# EAGLE board 14148-Qwiic_UV_Sensor_VEML6075-Panel (EAGLE 9.1.0), part 1 of 2
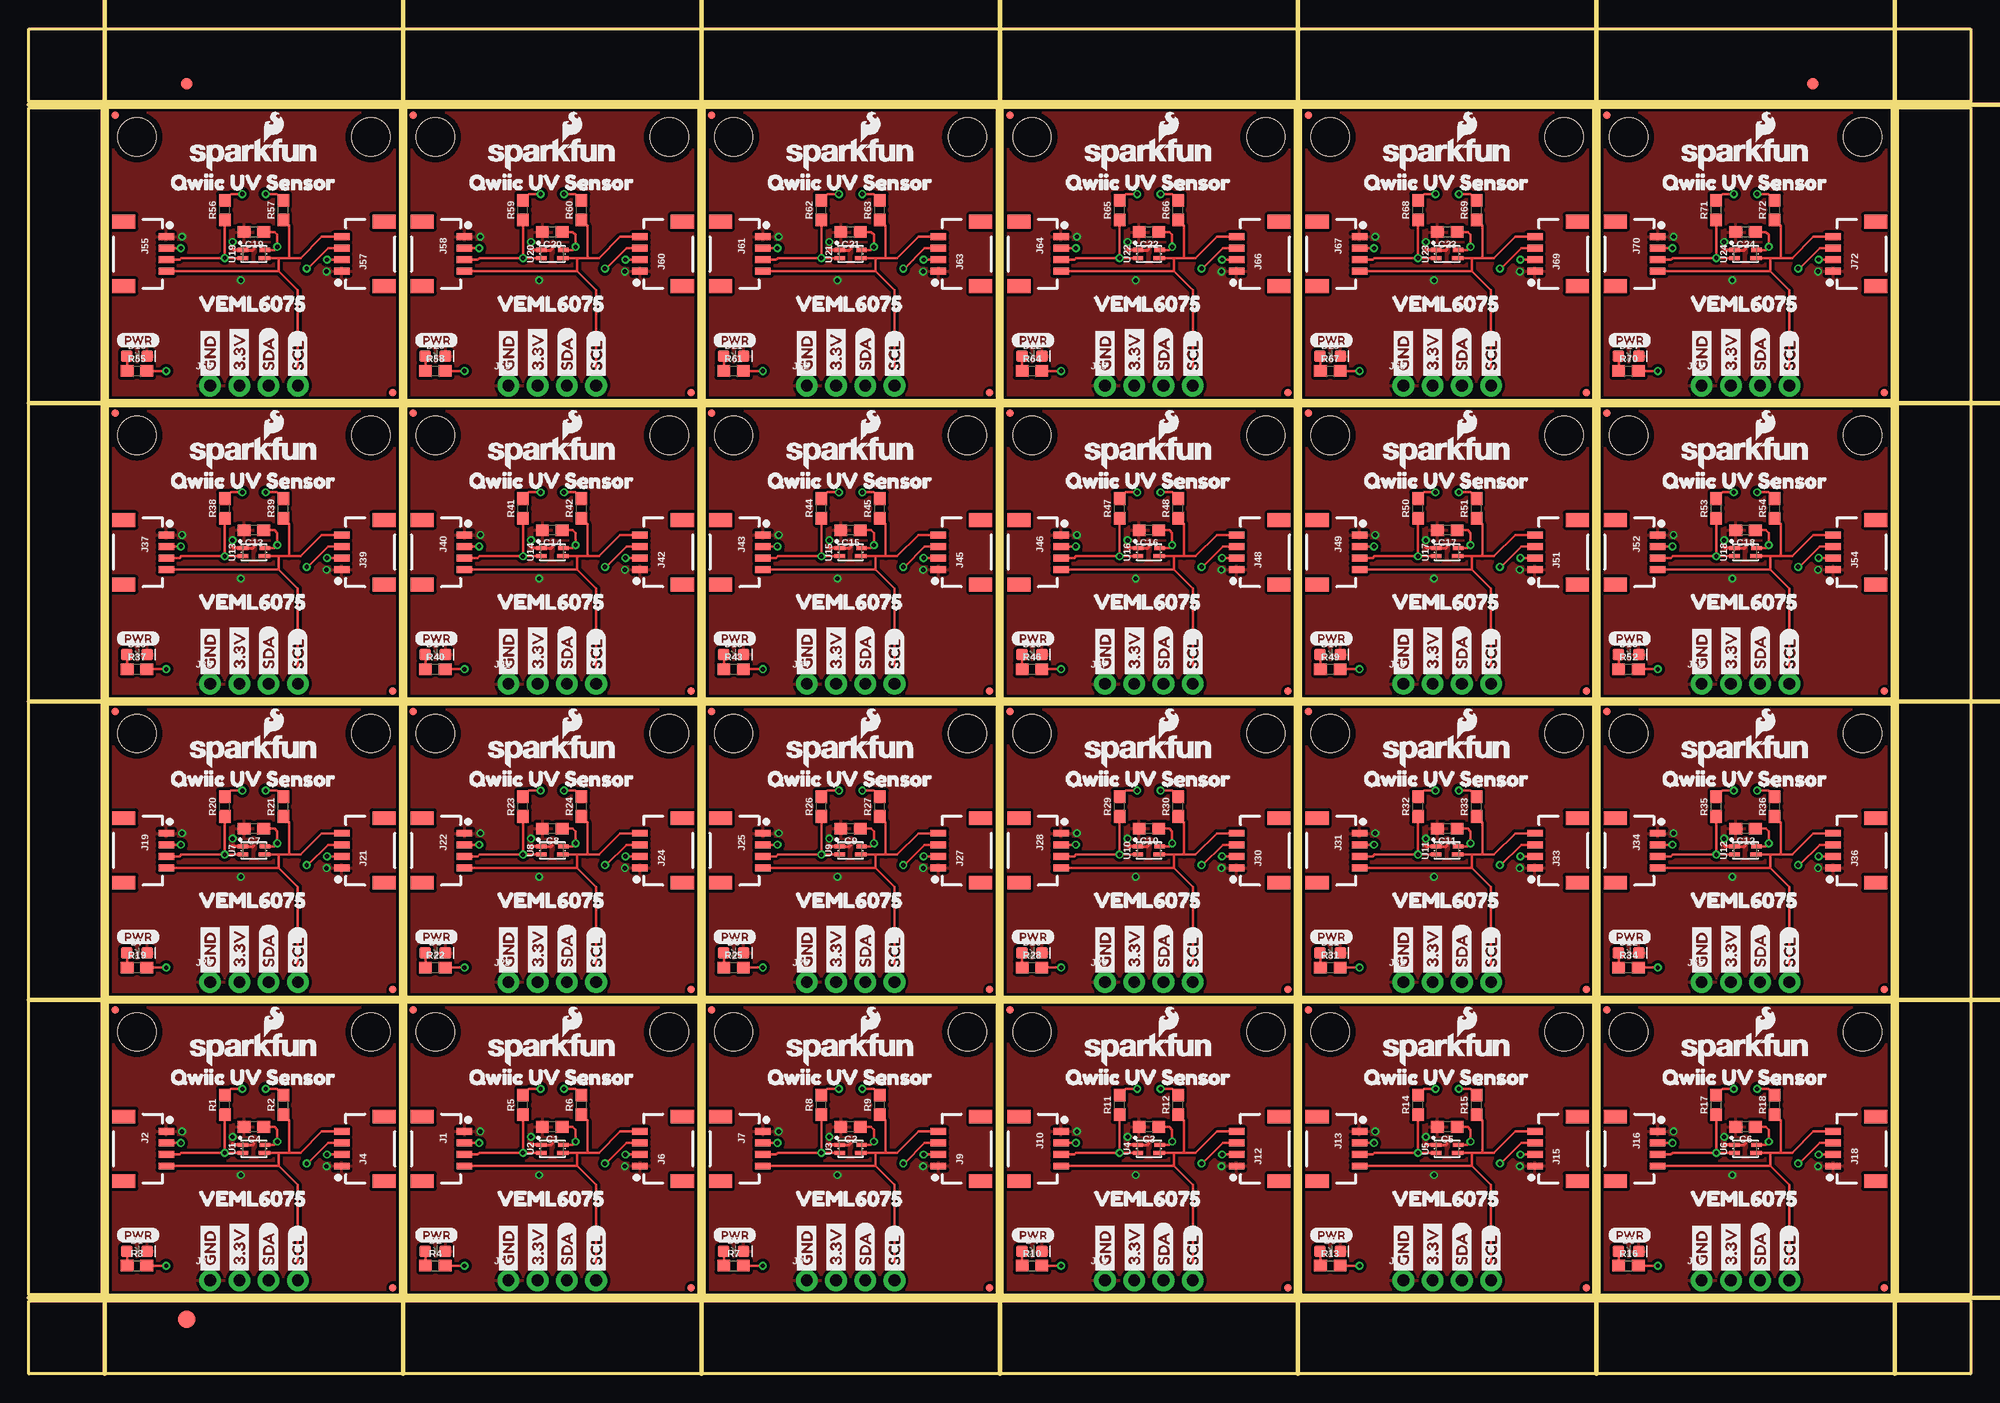
[diagram p0: board, top side]
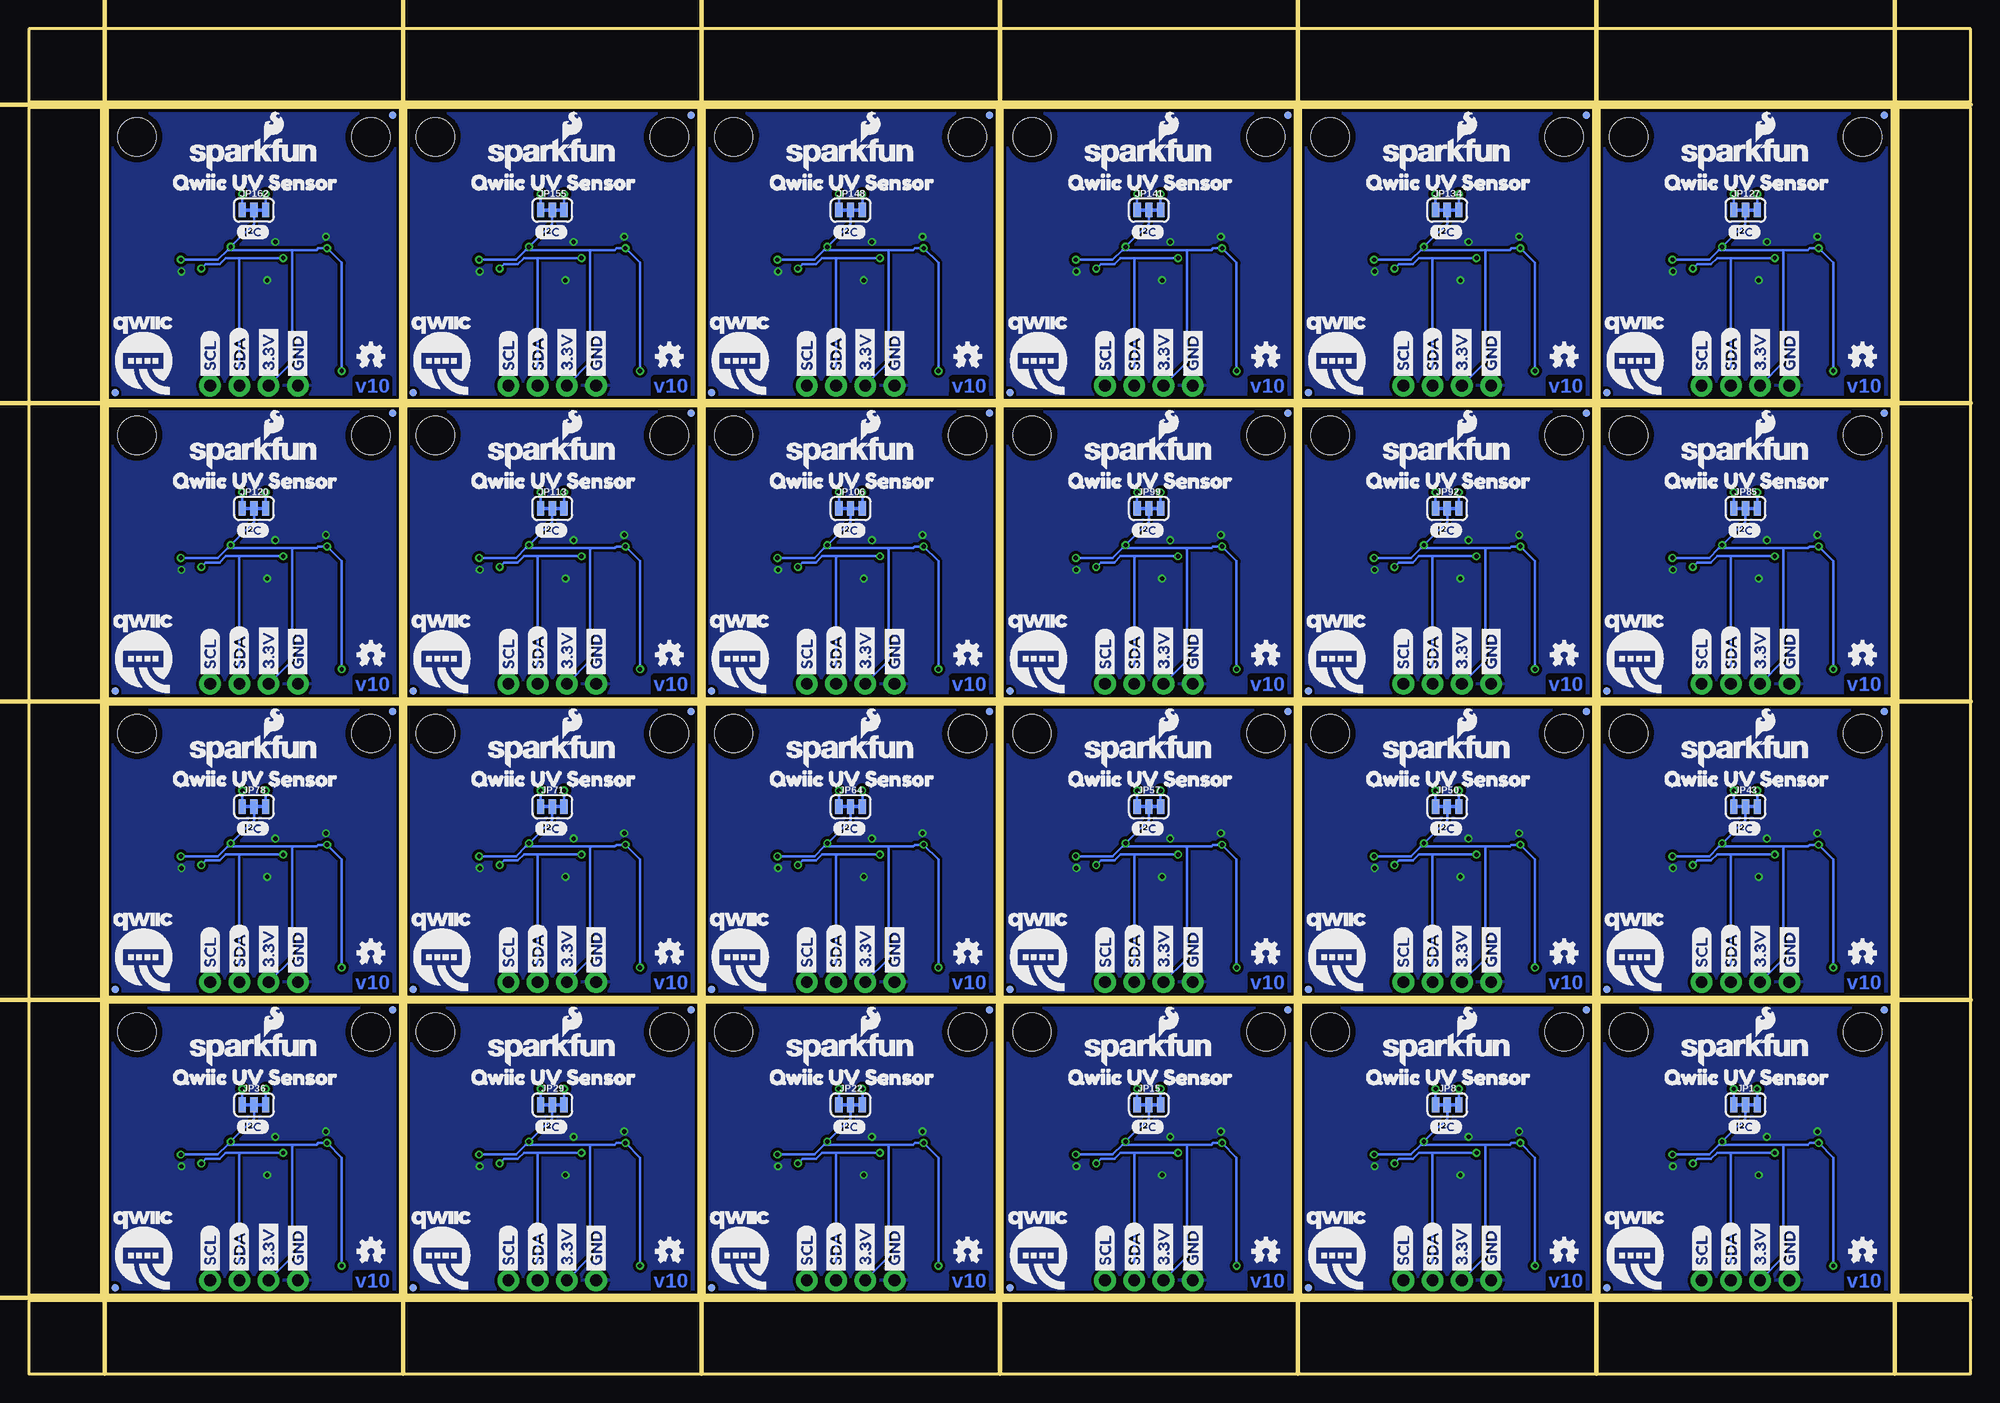
[diagram p1: board, bottom side, seen from below]

Size 168.66 x 116.84 mm. Coordinates in mm from the lower left corner, seen from the top.
Outline: 6.86,6.86 32.26,6.86 32.26,32.26 6.86,32.26 6.86,6.86
Outline: 32.77,6.86 58.17,6.86 58.17,32.26 32.77,32.26 32.77,6.86
Outline: 58.67,6.86 84.07,6.86 84.07,32.26 58.67,32.26 58.67,6.86
Outline: 84.58,6.86 109.98,6.86 109.98,32.26 84.58,32.26 84.58,6.86
Outline: 110.49,6.86 135.89,6.86 135.89,32.26 110.49,32.26 110.49,6.86
Outline: 136.4,6.86 161.8,6.86 161.8,32.26 136.4,32.26 136.4,6.86
Outline: 6.86,32.77 32.26,32.77 32.26,58.17 6.86,58.17 6.86,32.77
Outline: 32.77,32.77 58.17,32.77 58.17,58.17 32.77,58.17 32.77,32.77
Outline: 58.67,32.77 84.07,32.77 84.07,58.17 58.67,58.17 58.67,32.77
Outline: 84.58,32.77 109.98,32.77 109.98,58.17 84.58,58.17 84.58,32.77
Outline: 110.49,32.77 135.89,32.77 135.89,58.17 110.49,58.17 110.49,32.77
Outline: 136.4,32.77 161.8,32.77 161.8,58.17 136.4,58.17 136.4,32.77
Outline: 6.86,58.67 32.26,58.67 32.26,84.07 6.86,84.07 6.86,58.67
Outline: 32.77,58.67 58.17,58.67 58.17,84.07 32.77,84.07 32.77,58.67
Outline: 58.67,58.67 84.07,58.67 84.07,84.07 58.67,84.07 58.67,58.67
Outline: 84.58,58.67 109.98,58.67 109.98,84.07 84.58,84.07 84.58,58.67
Outline: 110.49,58.67 135.89,58.67 135.89,84.07 110.49,84.07 110.49,58.67
Outline: 136.4,58.67 161.8,58.67 161.8,84.07 136.4,84.07 136.4,58.67
Outline: 6.86,84.58 32.26,84.58 32.26,109.98 6.86,109.98 6.86,84.58
Outline: 32.77,84.58 58.17,84.58 58.17,109.98 32.77,109.98 32.77,84.58
Outline: 58.67,84.58 84.07,84.58 84.07,109.98 58.67,109.98 58.67,84.58
Outline: 84.58,84.58 109.98,84.58 109.98,109.98 84.58,109.98 84.58,84.58
Outline: 110.49,84.58 135.89,84.58 135.89,109.98 110.49,109.98 110.49,84.58
Outline: 136.4,84.58 161.8,84.58 161.8,109.98 136.4,109.98 136.4,84.58
Outline: 0,6.35 168.66,6.35 168.66,0 0,0 0,6.35
Outline: 162.31,109.98 168.66,109.98 168.66,6.86 162.31,6.86 162.31,109.98
Outline: 0,116.84 168.66,116.84 168.66,110.49 0,110.49 0,116.84
Outline: 0,109.98 6.35,109.98 6.35,6.86 0,6.86 0,109.98
Copper layers (1*16): Top 0.035mm / dielectric 1.5mm / Bottom 0.035mm
Design rules "SparkFun-2-layer-PCBWay-LIMIT": minimum track width 6mil, minimum drill 0.3mm, track to track 6mil, track to pad 6mil, pad to pad 6mil, via to via 6mil, smd to smd 6mil, copper to edge 6mil, drill to drill 6mil, minimum pad ring 6mil, minimum via ring 6mil, stop-mask expansion 4mil, vias tented up to drill 25mil, thermal gap 10mil
Milling: 12 lines

## Footprints (pad centres in the part's own frame; a part is rotated, then mirrored left to right if it is on the bottom)
0603 = smd 1.1 x 1: 1 -0.85,0; 2 0.85,0
LED-0603 = smd 1 x 1: A -0.877,0; C 0.877,0
FIDUCIAL-1X2 = smd 1 x 1: 1 0,0
FIDUCIAL-1.5X3 = smd 1.5 x 1.5: 1 0,0
1X04_1MM_RA = smd 0.6 x 1.35: 1 -1.5,0; 2 -0.5,0; 3 0.5,0; 4 1.5,0 | smd 1.2 x 2: NC1 2.8,-3.675; NC2 -2.8,-3.675
1X04_NO_SILK = drill 1.016 pad 1.88: 1 0,0; 2 2.54,0; 3 5.08,0; 4 7.62,0
SMT-JUMPER_3_2-NC_TRACE_SILK = smd 0.635 x 1.27: 1 -1.016,0; 2 0,0; 3 1.016,0
MICRO-FIDUCIAL = smd 0.635 x 0.635: 1 0,0
STAND-OFF = hole 3.302: 0,0
VEML6075_A3OP = smd 0.9 x 0.35: 1 -0.95,0.35; 2 -0.95,-0.35; 4 0.95,0.35 | smd 1 x 0.35: 3 0.9,-0.35

## Placement (x,y rotation side)
C1  0.1uF  [0603]  45.47,21.46 180 top
C2  0.1uF  [0603]  71.37,21.46 180 top
C3  0.1uF  [0603]  97.28,21.46 180 top
C4  0.1uF  [0603]  19.56,21.46 180 top
C5  0.1uF  [0603]  123.19,21.46 180 top
C6  0.1uF  [0603]  149.1,21.46 180 top
C7  0.1uF  [0603]  19.56,47.37 180 top
C8  0.1uF  [0603]  45.47,47.37 180 top
C9  0.1uF  [0603]  71.37,47.37 180 top
C10  0.1uF  [0603]  97.28,47.37 180 top
C11  0.1uF  [0603]  123.19,47.37 180 top
C12  0.1uF  [0603]  149.1,47.37 180 top
C13  0.1uF  [0603]  19.56,73.28 180 top
C14  0.1uF  [0603]  45.47,73.28 180 top
C15  0.1uF  [0603]  71.37,73.28 180 top
C16  0.1uF  [0603]  97.28,73.28 180 top
C17  0.1uF  [0603]  123.19,73.28 180 top
C18  0.1uF  [0603]  149.1,73.28 180 top
C19  0.1uF  [0603]  19.56,99.19 180 top
C20  0.1uF  [0603]  45.47,99.19 180 top
C21  0.1uF  [0603]  71.37,99.19 180 top
C22  0.1uF  [0603]  97.28,99.19 180 top
C23  0.1uF  [0603]  123.19,99.19 180 top
C24  0.1uF  [0603]  149.1,99.19 180 top
D1  RED  [LED-0603]  9.4,10.67 0 top
D2  RED  [LED-0603]  35.31,10.67 0 top
D3  RED  [LED-0603]  61.21,10.67 0 top
D4  RED  [LED-0603]  87.12,10.67 0 top
D5  RED  [LED-0603]  113.03,10.67 0 top
D6  RED  [LED-0603]  138.94,10.67 0 top
D7  RED  [LED-0603]  9.4,36.58 0 top
D8  RED  [LED-0603]  35.31,36.58 0 top
D9  RED  [LED-0603]  61.21,36.58 0 top
D10  RED  [LED-0603]  87.12,36.58 0 top
D11  RED  [LED-0603]  113.03,36.58 0 top
D12  RED  [LED-0603]  138.94,36.58 0 top
D13  RED  [LED-0603]  9.4,62.48 0 top
D14  RED  [LED-0603]  35.31,62.48 0 top
D15  RED  [LED-0603]  61.21,62.48 0 top
D16  RED  [LED-0603]  87.12,62.48 0 top
D17  RED  [LED-0603]  113.03,62.48 0 top
D18  RED  [LED-0603]  138.94,62.48 0 top
D19  RED  [LED-0603]  9.4,88.39 0 top
D20  RED  [LED-0603]  35.31,88.39 0 top
D21  RED  [LED-0603]  61.21,88.39 0 top
D22  RED  [LED-0603]  87.12,88.39 0 top
D23  RED  [LED-0603]  113.03,88.39 0 top
D24  RED  [LED-0603]  138.94,88.39 0 top
E$1  [FIDUCIAL-1X2]  13.72,112.08 0 top
E$2  [FIDUCIAL-1X2]  154.94,112.08 0 top
E$3  [FIDUCIAL-1.5X3]  13.72,4.76 0 top
J1  [1X04_1MM_RA]  37.85,19.56 270 top
J2  [1X04_1MM_RA]  11.94,19.56 270 top
J3  PTH  [1X04_NO_SILK]  15.75,8.13 0 top
J4  [1X04_1MM_RA]  27.18,19.56 90 top
J5  PTH  [1X04_NO_SILK]  41.66,8.13 0 top
J6  [1X04_1MM_RA]  53.09,19.56 90 top
J7  [1X04_1MM_RA]  63.75,19.56 270 top
J8  PTH  [1X04_NO_SILK]  67.56,8.13 0 top
J9  [1X04_1MM_RA]  78.99,19.56 90 top
J10  [1X04_1MM_RA]  89.66,19.56 270 top
J11  PTH  [1X04_NO_SILK]  93.47,8.13 0 top
J12  [1X04_1MM_RA]  104.9,19.56 90 top
J13  [1X04_1MM_RA]  115.57,19.56 270 top
J14  PTH  [1X04_NO_SILK]  119.38,8.13 0 top
J15  [1X04_1MM_RA]  130.81,19.56 90 top
J16  [1X04_1MM_RA]  141.48,19.56 270 top
J17  PTH  [1X04_NO_SILK]  145.29,8.13 0 top
J18  [1X04_1MM_RA]  156.72,19.56 90 top
J19  [1X04_1MM_RA]  11.94,45.47 270 top
J20  PTH  [1X04_NO_SILK]  15.75,34.04 0 top
J21  [1X04_1MM_RA]  27.18,45.47 90 top
J22  [1X04_1MM_RA]  37.85,45.47 270 top
J23  PTH  [1X04_NO_SILK]  41.66,34.04 0 top
J24  [1X04_1MM_RA]  53.09,45.47 90 top
J25  [1X04_1MM_RA]  63.75,45.47 270 top
J26  PTH  [1X04_NO_SILK]  67.56,34.04 0 top
J27  [1X04_1MM_RA]  78.99,45.47 90 top
J28  [1X04_1MM_RA]  89.66,45.47 270 top
J29  PTH  [1X04_NO_SILK]  93.47,34.04 0 top
J30  [1X04_1MM_RA]  104.9,45.47 90 top
J31  [1X04_1MM_RA]  115.57,45.47 270 top
J32  PTH  [1X04_NO_SILK]  119.38,34.04 0 top
J33  [1X04_1MM_RA]  130.81,45.47 90 top
J34  [1X04_1MM_RA]  141.48,45.47 270 top
J35  PTH  [1X04_NO_SILK]  145.29,34.04 0 top
J36  [1X04_1MM_RA]  156.72,45.47 90 top
J37  [1X04_1MM_RA]  11.94,71.37 270 top
J38  PTH  [1X04_NO_SILK]  15.75,59.94 0 top
J39  [1X04_1MM_RA]  27.18,71.37 90 top
J40  [1X04_1MM_RA]  37.85,71.37 270 top
J41  PTH  [1X04_NO_SILK]  41.66,59.94 0 top
J42  [1X04_1MM_RA]  53.09,71.37 90 top
J43  [1X04_1MM_RA]  63.75,71.37 270 top
J44  PTH  [1X04_NO_SILK]  67.56,59.94 0 top
J45  [1X04_1MM_RA]  78.99,71.37 90 top
J46  [1X04_1MM_RA]  89.66,71.37 270 top
J47  PTH  [1X04_NO_SILK]  93.47,59.94 0 top
J48  [1X04_1MM_RA]  104.9,71.37 90 top
J49  [1X04_1MM_RA]  115.57,71.37 270 top
J50  PTH  [1X04_NO_SILK]  119.38,59.94 0 top
J51  [1X04_1MM_RA]  130.81,71.37 90 top
J52  [1X04_1MM_RA]  141.48,71.37 270 top
J53  PTH  [1X04_NO_SILK]  145.29,59.94 0 top
J54  [1X04_1MM_RA]  156.72,71.37 90 top
J55  [1X04_1MM_RA]  11.94,97.28 270 top
J56  PTH  [1X04_NO_SILK]  15.75,85.85 0 top
J57  [1X04_1MM_RA]  27.18,97.28 90 top
J58  [1X04_1MM_RA]  37.85,97.28 270 top
J59  PTH  [1X04_NO_SILK]  41.66,85.85 0 top
J60  [1X04_1MM_RA]  53.09,97.28 90 top
J61  [1X04_1MM_RA]  63.75,97.28 270 top
J62  PTH  [1X04_NO_SILK]  67.56,85.85 0 top
J63  [1X04_1MM_RA]  78.99,97.28 90 top
J64  [1X04_1MM_RA]  89.66,97.28 270 top
J65  PTH  [1X04_NO_SILK]  93.47,85.85 0 top
J66  [1X04_1MM_RA]  104.9,97.28 90 top
J67  [1X04_1MM_RA]  115.57,97.28 270 top
J68  PTH  [1X04_NO_SILK]  119.38,85.85 0 top
J69  [1X04_1MM_RA]  130.81,97.28 90 top
J70  [1X04_1MM_RA]  141.48,97.28 270 top
J71  PTH  [1X04_NO_SILK]  145.29,85.85 0 top
J72  [1X04_1MM_RA]  156.72,97.28 90 top
JP1  I2C  [SMT-JUMPER_3_2-NC_TRACE_SILK]  19.56,23.37 0 bottom
JP2  FIDUCIALUFIDUCIAL  [MICRO-FIDUCIAL]  31.62,7.49 0 bottom
JP3  STAND-OFF  [STAND-OFF]  9.4,29.72 0 top
JP4  STAND-OFF  [STAND-OFF]  29.72,29.72 90 top
JP5  FIDUCIALUFIDUCIAL  [MICRO-FIDUCIAL]  31.62,7.49 0 top
JP6  FIDUCIALUFIDUCIAL  [MICRO-FIDUCIAL]  7.49,31.62 0 top
JP7  FIDUCIALUFIDUCIAL  [MICRO-FIDUCIAL]  7.49,31.62 0 bottom
JP8  I2C  [SMT-JUMPER_3_2-NC_TRACE_SILK]  45.47,23.37 0 bottom
JP9  STAND-OFF  [STAND-OFF]  35.31,29.72 0 top
JP10  STAND-OFF  [STAND-OFF]  55.63,29.72 90 top
JP11  FIDUCIALUFIDUCIAL  [MICRO-FIDUCIAL]  57.53,7.49 0 bottom
JP12  FIDUCIALUFIDUCIAL  [MICRO-FIDUCIAL]  33.4,31.62 0 top
JP13  FIDUCIALUFIDUCIAL  [MICRO-FIDUCIAL]  57.53,7.49 0 top
JP14  FIDUCIALUFIDUCIAL  [MICRO-FIDUCIAL]  33.4,31.62 0 bottom
JP15  I2C  [SMT-JUMPER_3_2-NC_TRACE_SILK]  71.37,23.37 0 bottom
JP16  STAND-OFF  [STAND-OFF]  61.21,29.72 0 top
JP17  STAND-OFF  [STAND-OFF]  81.53,29.72 90 top
JP18  FIDUCIALUFIDUCIAL  [MICRO-FIDUCIAL]  83.44,7.49 0 bottom
JP19  FIDUCIALUFIDUCIAL  [MICRO-FIDUCIAL]  59.31,31.62 0 top
JP20  FIDUCIALUFIDUCIAL  [MICRO-FIDUCIAL]  83.44,7.49 0 top
JP21  FIDUCIALUFIDUCIAL  [MICRO-FIDUCIAL]  59.31,31.62 0 bottom
JP22  I2C  [SMT-JUMPER_3_2-NC_TRACE_SILK]  97.28,23.37 0 bottom
JP23  STAND-OFF  [STAND-OFF]  87.12,29.72 0 top
JP24  STAND-OFF  [STAND-OFF]  107.44,29.72 90 top
JP25  FIDUCIALUFIDUCIAL  [MICRO-FIDUCIAL]  109.35,7.49 0 bottom
JP26  FIDUCIALUFIDUCIAL  [MICRO-FIDUCIAL]  85.22,31.62 0 top
JP27  FIDUCIALUFIDUCIAL  [MICRO-FIDUCIAL]  109.35,7.49 0 top
JP28  FIDUCIALUFIDUCIAL  [MICRO-FIDUCIAL]  85.22,31.62 0 bottom
JP29  I2C  [SMT-JUMPER_3_2-NC_TRACE_SILK]  123.19,23.37 0 bottom
JP30  STAND-OFF  [STAND-OFF]  113.03,29.72 0 top
JP31  STAND-OFF  [STAND-OFF]  133.35,29.72 90 top
JP32  FIDUCIALUFIDUCIAL  [MICRO-FIDUCIAL]  135.25,7.49 0 bottom
JP33  FIDUCIALUFIDUCIAL  [MICRO-FIDUCIAL]  111.12,31.62 0 top
JP34  FIDUCIALUFIDUCIAL  [MICRO-FIDUCIAL]  135.25,7.49 0 top
JP35  FIDUCIALUFIDUCIAL  [MICRO-FIDUCIAL]  111.12,31.62 0 bottom
JP36  I2C  [SMT-JUMPER_3_2-NC_TRACE_SILK]  149.1,23.37 0 bottom
JP37  STAND-OFF  [STAND-OFF]  138.94,29.72 0 top
JP38  STAND-OFF  [STAND-OFF]  159.26,29.72 90 top
JP39  FIDUCIALUFIDUCIAL  [MICRO-FIDUCIAL]  161.16,7.49 0 bottom
JP40  FIDUCIALUFIDUCIAL  [MICRO-FIDUCIAL]  137.03,31.62 0 top
JP41  FIDUCIALUFIDUCIAL  [MICRO-FIDUCIAL]  161.16,7.49 0 top
JP42  FIDUCIALUFIDUCIAL  [MICRO-FIDUCIAL]  137.03,31.62 0 bottom
JP43  I2C  [SMT-JUMPER_3_2-NC_TRACE_SILK]  19.56,49.28 0 bottom
JP44  STAND-OFF  [STAND-OFF]  9.4,55.63 0 top
JP45  STAND-OFF  [STAND-OFF]  29.72,55.63 90 top
JP46  FIDUCIALUFIDUCIAL  [MICRO-FIDUCIAL]  31.62,33.4 0 bottom
JP47  FIDUCIALUFIDUCIAL  [MICRO-FIDUCIAL]  7.49,57.53 0 top
JP48  FIDUCIALUFIDUCIAL  [MICRO-FIDUCIAL]  31.62,33.4 0 top
JP49  FIDUCIALUFIDUCIAL  [MICRO-FIDUCIAL]  7.49,57.53 0 bottom
JP50  I2C  [SMT-JUMPER_3_2-NC_TRACE_SILK]  45.47,49.28 0 bottom
JP51  STAND-OFF  [STAND-OFF]  35.31,55.63 0 top
JP52  STAND-OFF  [STAND-OFF]  55.63,55.63 90 top
JP53  FIDUCIALUFIDUCIAL  [MICRO-FIDUCIAL]  57.53,33.4 0 bottom
JP54  FIDUCIALUFIDUCIAL  [MICRO-FIDUCIAL]  33.4,57.53 0 top
JP55  FIDUCIALUFIDUCIAL  [MICRO-FIDUCIAL]  57.53,33.4 0 top
JP56  FIDUCIALUFIDUCIAL  [MICRO-FIDUCIAL]  33.4,57.53 0 bottom
JP57  I2C  [SMT-JUMPER_3_2-NC_TRACE_SILK]  71.37,49.28 0 bottom
JP58  STAND-OFF  [STAND-OFF]  61.21,55.63 0 top
JP59  STAND-OFF  [STAND-OFF]  81.53,55.63 90 top
JP60  FIDUCIALUFIDUCIAL  [MICRO-FIDUCIAL]  83.44,33.4 0 bottom
JP61  FIDUCIALUFIDUCIAL  [MICRO-FIDUCIAL]  59.31,57.53 0 top
JP62  FIDUCIALUFIDUCIAL  [MICRO-FIDUCIAL]  83.44,33.4 0 top
JP63  FIDUCIALUFIDUCIAL  [MICRO-FIDUCIAL]  59.31,57.53 0 bottom
JP64  I2C  [SMT-JUMPER_3_2-NC_TRACE_SILK]  97.28,49.28 0 bottom
JP65  STAND-OFF  [STAND-OFF]  87.12,55.63 0 top
JP66  STAND-OFF  [STAND-OFF]  107.44,55.63 90 top
JP67  FIDUCIALUFIDUCIAL  [MICRO-FIDUCIAL]  109.35,33.4 0 bottom
JP68  FIDUCIALUFIDUCIAL  [MICRO-FIDUCIAL]  85.22,57.53 0 top
JP69  FIDUCIALUFIDUCIAL  [MICRO-FIDUCIAL]  109.35,33.4 0 top
JP70  FIDUCIALUFIDUCIAL  [MICRO-FIDUCIAL]  85.22,57.53 0 bottom
JP71  I2C  [SMT-JUMPER_3_2-NC_TRACE_SILK]  123.19,49.28 0 bottom
JP72  STAND-OFF  [STAND-OFF]  113.03,55.63 0 top
JP73  STAND-OFF  [STAND-OFF]  133.35,55.63 90 top
JP74  FIDUCIALUFIDUCIAL  [MICRO-FIDUCIAL]  135.25,33.4 0 bottom
JP75  FIDUCIALUFIDUCIAL  [MICRO-FIDUCIAL]  111.12,57.53 0 top
JP76  FIDUCIALUFIDUCIAL  [MICRO-FIDUCIAL]  135.25,33.4 0 top
JP77  FIDUCIALUFIDUCIAL  [MICRO-FIDUCIAL]  111.12,57.53 0 bottom
JP78  I2C  [SMT-JUMPER_3_2-NC_TRACE_SILK]  149.1,49.28 0 bottom
JP79  STAND-OFF  [STAND-OFF]  138.94,55.63 0 top
JP80  STAND-OFF  [STAND-OFF]  159.26,55.63 90 top
JP81  FIDUCIALUFIDUCIAL  [MICRO-FIDUCIAL]  161.16,33.4 0 bottom
JP82  FIDUCIALUFIDUCIAL  [MICRO-FIDUCIAL]  137.03,57.53 0 top
JP83  FIDUCIALUFIDUCIAL  [MICRO-FIDUCIAL]  161.16,33.4 0 top
JP84  FIDUCIALUFIDUCIAL  [MICRO-FIDUCIAL]  137.03,57.53 0 bottom
JP85  I2C  [SMT-JUMPER_3_2-NC_TRACE_SILK]  19.56,75.18 0 bottom
JP86  STAND-OFF  [STAND-OFF]  9.4,81.53 0 top
JP87  STAND-OFF  [STAND-OFF]  29.72,81.53 90 top
JP88  FIDUCIALUFIDUCIAL  [MICRO-FIDUCIAL]  31.62,59.31 0 bottom
JP89  FIDUCIALUFIDUCIAL  [MICRO-FIDUCIAL]  7.49,83.44 0 top
JP90  FIDUCIALUFIDUCIAL  [MICRO-FIDUCIAL]  31.62,59.31 0 top
JP91  FIDUCIALUFIDUCIAL  [MICRO-FIDUCIAL]  7.49,83.44 0 bottom
JP92  I2C  [SMT-JUMPER_3_2-NC_TRACE_SILK]  45.47,75.18 0 bottom
JP93  STAND-OFF  [STAND-OFF]  35.31,81.53 0 top
JP94  STAND-OFF  [STAND-OFF]  55.63,81.53 90 top
JP95  FIDUCIALUFIDUCIAL  [MICRO-FIDUCIAL]  57.53,59.31 0 bottom
JP96  FIDUCIALUFIDUCIAL  [MICRO-FIDUCIAL]  33.4,83.44 0 top
JP97  FIDUCIALUFIDUCIAL  [MICRO-FIDUCIAL]  57.53,59.31 0 top
JP98  FIDUCIALUFIDUCIAL  [MICRO-FIDUCIAL]  33.4,83.44 0 bottom
JP99  I2C  [SMT-JUMPER_3_2-NC_TRACE_SILK]  71.37,75.18 0 bottom
JP100  STAND-OFF  [STAND-OFF]  61.21,81.53 0 top
JP101  STAND-OFF  [STAND-OFF]  81.53,81.53 90 top
JP102  FIDUCIALUFIDUCIAL  [MICRO-FIDUCIAL]  83.44,59.31 0 bottom
JP103  FIDUCIALUFIDUCIAL  [MICRO-FIDUCIAL]  59.31,83.44 0 top
JP104  FIDUCIALUFIDUCIAL  [MICRO-FIDUCIAL]  83.44,59.31 0 top
JP105  FIDUCIALUFIDUCIAL  [MICRO-FIDUCIAL]  59.31,83.44 0 bottom
JP106  I2C  [SMT-JUMPER_3_2-NC_TRACE_SILK]  97.28,75.18 0 bottom
JP107  STAND-OFF  [STAND-OFF]  87.12,81.53 0 top
JP108  STAND-OFF  [STAND-OFF]  107.44,81.53 90 top
JP109  FIDUCIALUFIDUCIAL  [MICRO-FIDUCIAL]  109.35,59.31 0 bottom
JP110  FIDUCIALUFIDUCIAL  [MICRO-FIDUCIAL]  85.22,83.44 0 top
JP111  FIDUCIALUFIDUCIAL  [MICRO-FIDUCIAL]  109.35,59.31 0 top
JP112  FIDUCIALUFIDUCIAL  [MICRO-FIDUCIAL]  85.22,83.44 0 bottom
JP113  I2C  [SMT-JUMPER_3_2-NC_TRACE_SILK]  123.19,75.18 0 bottom
JP114  STAND-OFF  [STAND-OFF]  113.03,81.53 0 top
JP115  STAND-OFF  [STAND-OFF]  133.35,81.53 90 top
JP116  FIDUCIALUFIDUCIAL  [MICRO-FIDUCIAL]  135.25,59.31 0 bottom
JP117  FIDUCIALUFIDUCIAL  [MICRO-FIDUCIAL]  111.12,83.44 0 top
JP118  FIDUCIALUFIDUCIAL  [MICRO-FIDUCIAL]  135.25,59.31 0 top
JP119  FIDUCIALUFIDUCIAL  [MICRO-FIDUCIAL]  111.12,83.44 0 bottom
JP120  I2C  [SMT-JUMPER_3_2-NC_TRACE_SILK]  149.1,75.18 0 bottom
JP121  STAND-OFF  [STAND-OFF]  138.94,81.53 0 top
JP122  STAND-OFF  [STAND-OFF]  159.26,81.53 90 top
JP123  FIDUCIALUFIDUCIAL  [MICRO-FIDUCIAL]  161.16,59.31 0 bottom
JP124  FIDUCIALUFIDUCIAL  [MICRO-FIDUCIAL]  137.03,83.44 0 top
JP125  FIDUCIALUFIDUCIAL  [MICRO-FIDUCIAL]  161.16,59.31 0 top
JP126  FIDUCIALUFIDUCIAL  [MICRO-FIDUCIAL]  137.03,83.44 0 bottom
JP127  I2C  [SMT-JUMPER_3_2-NC_TRACE_SILK]  19.56,101.09 0 bottom
JP128  STAND-OFF  [STAND-OFF]  9.4,107.44 0 top
JP129  STAND-OFF  [STAND-OFF]  29.72,107.44 90 top
JP130  FIDUCIALUFIDUCIAL  [MICRO-FIDUCIAL]  31.62,85.22 0 bottom
JP131  FIDUCIALUFIDUCIAL  [MICRO-FIDUCIAL]  7.49,109.35 0 top
JP132  FIDUCIALUFIDUCIAL  [MICRO-FIDUCIAL]  31.62,85.22 0 top
JP133  FIDUCIALUFIDUCIAL  [MICRO-FIDUCIAL]  7.49,109.35 0 bottom
JP134  I2C  [SMT-JUMPER_3_2-NC_TRACE_SILK]  45.47,101.09 0 bottom
JP135  STAND-OFF  [STAND-OFF]  35.31,107.44 0 top
JP136  STAND-OFF  [STAND-OFF]  55.63,107.44 90 top
JP137  FIDUCIALUFIDUCIAL  [MICRO-FIDUCIAL]  57.53,85.22 0 bottom
JP138  FIDUCIALUFIDUCIAL  [MICRO-FIDUCIAL]  33.4,109.35 0 top
JP139  FIDUCIALUFIDUCIAL  [MICRO-FIDUCIAL]  57.53,85.22 0 top
JP140  FIDUCIALUFIDUCIAL  [MICRO-FIDUCIAL]  33.4,109.35 0 bottom
JP141  I2C  [SMT-JUMPER_3_2-NC_TRACE_SILK]  71.37,101.09 0 bottom
JP142  STAND-OFF  [STAND-OFF]  61.21,107.44 0 top
JP143  STAND-OFF  [STAND-OFF]  81.53,107.44 90 top
JP144  FIDUCIALUFIDUCIAL  [MICRO-FIDUCIAL]  83.44,85.22 0 bottom
JP145  FIDUCIALUFIDUCIAL  [MICRO-FIDUCIAL]  59.31,109.35 0 top
JP146  FIDUCIALUFIDUCIAL  [MICRO-FIDUCIAL]  83.44,85.22 0 top
JP147  FIDUCIALUFIDUCIAL  [MICRO-FIDUCIAL]  59.31,109.35 0 bottom
JP148  I2C  [SMT-JUMPER_3_2-NC_TRACE_SILK]  97.28,101.09 0 bottom
JP149  STAND-OFF  [STAND-OFF]  87.12,107.44 0 top
JP150  STAND-OFF  [STAND-OFF]  107.44,107.44 90 top
JP151  FIDUCIALUFIDUCIAL  [MICRO-FIDUCIAL]  109.35,85.22 0 bottom
JP152  FIDUCIALUFIDUCIAL  [MICRO-FIDUCIAL]  85.22,109.35 0 top
JP153  FIDUCIALUFIDUCIAL  [MICRO-FIDUCIAL]  109.35,85.22 0 top
JP154  FIDUCIALUFIDUCIAL  [MICRO-FIDUCIAL]  85.22,109.35 0 bottom
JP155  I2C  [SMT-JUMPER_3_2-NC_TRACE_SILK]  123.19,101.09 0 bottom
JP156  STAND-OFF  [STAND-OFF]  113.03,107.44 0 top
JP157  STAND-OFF  [STAND-OFF]  133.35,107.44 90 top
JP158  FIDUCIALUFIDUCIAL  [MICRO-FIDUCIAL]  135.25,85.22 0 bottom
JP159  FIDUCIALUFIDUCIAL  [MICRO-FIDUCIAL]  111.12,109.35 0 top
JP160  FIDUCIALUFIDUCIAL  [MICRO-FIDUCIAL]  135.25,85.22 0 top
JP161  FIDUCIALUFIDUCIAL  [MICRO-FIDUCIAL]  111.12,109.35 0 bottom
JP162  I2C  [SMT-JUMPER_3_2-NC_TRACE_SILK]  149.1,101.09 0 bottom
JP163  STAND-OFF  [STAND-OFF]  138.94,107.44 0 top
JP164  STAND-OFF  [STAND-OFF]  159.26,107.44 90 top
JP165  FIDUCIALUFIDUCIAL  [MICRO-FIDUCIAL]  161.16,85.22 0 bottom
JP166  FIDUCIALUFIDUCIAL  [MICRO-FIDUCIAL]  137.03,109.35 0 top
JP167  FIDUCIALUFIDUCIAL  [MICRO-FIDUCIAL]  161.16,85.22 0 top
JP168  FIDUCIALUFIDUCIAL  [MICRO-FIDUCIAL]  137.03,109.35 0 bottom
LOGO1  OSHW-LOGOMINI  [OSHW-LOGO-MINI]  9.4,10.67 0 bottom
LOGO2  OSHW-LOGOMINI  [OSHW-LOGO-MINI]  35.31,10.67 0 bottom
LOGO3  OSHW-LOGOMINI  [OSHW-LOGO-MINI]  61.21,10.67 0 bottom
LOGO4  OSHW-LOGOMINI  [OSHW-LOGO-MINI]  87.12,10.67 0 bottom
LOGO5  OSHW-LOGOMINI  [OSHW-LOGO-MINI]  113.03,10.67 0 bottom
LOGO6  OSHW-LOGOMINI  [OSHW-LOGO-MINI]  138.94,10.67 0 bottom
LOGO7  OSHW-LOGOMINI  [OSHW-LOGO-MINI]  9.4,36.58 0 bottom
LOGO8  OSHW-LOGOMINI  [OSHW-LOGO-MINI]  35.31,36.58 0 bottom
LOGO9  OSHW-LOGOMINI  [OSHW-LOGO-MINI]  61.21,36.58 0 bottom
LOGO10  OSHW-LOGOMINI  [OSHW-LOGO-MINI]  87.12,36.58 0 bottom
LOGO11  OSHW-LOGOMINI  [OSHW-LOGO-MINI]  113.03,36.58 0 bottom
LOGO12  OSHW-LOGOMINI  [OSHW-LOGO-MINI]  138.94,36.58 0 bottom
LOGO13  OSHW-LOGOMINI  [OSHW-LOGO-MINI]  9.4,62.48 0 bottom
LOGO14  OSHW-LOGOMINI  [OSHW-LOGO-MINI]  35.31,62.48 0 bottom
LOGO15  OSHW-LOGOMINI  [OSHW-LOGO-MINI]  61.21,62.48 0 bottom
LOGO16  OSHW-LOGOMINI  [OSHW-LOGO-MINI]  87.12,62.48 0 bottom
LOGO17  OSHW-LOGOMINI  [OSHW-LOGO-MINI]  113.03,62.48 0 bottom
LOGO18  OSHW-LOGOMINI  [OSHW-LOGO-MINI]  138.94,62.48 0 bottom
LOGO19  OSHW-LOGOMINI  [OSHW-LOGO-MINI]  9.4,88.39 0 bottom
LOGO20  OSHW-LOGOMINI  [OSHW-LOGO-MINI]  35.31,88.39 0 bottom
LOGO21  OSHW-LOGOMINI  [OSHW-LOGO-MINI]  61.21,88.39 0 bottom
LOGO22  OSHW-LOGOMINI  [OSHW-LOGO-MINI]  87.12,88.39 0 bottom
LOGO23  OSHW-LOGOMINI  [OSHW-LOGO-MINI]  113.03,88.39 0 bottom
LOGO24  OSHW-LOGOMINI  [OSHW-LOGO-MINI]  138.94,88.39 0 bottom
R1  2.2k  [0603]  17.02,23.37 90 top
R2  2.2k  [0603]  22.1,23.37 90 top
R3  1k  [0603]  9.4,9.4 0 top
R4  1k  [0603]  35.31,9.4 0 top
R5  2.2k  [0603]  42.93,23.37 90 top
R6  2.2k  [0603]  48.01,23.37 90 top
R7  1k  [0603]  61.21,9.4 0 top
R8  2.2k  [0603]  68.83,23.37 90 top
R9  2.2k  [0603]  73.91,23.37 90 top
R10  1k  [0603]  87.12,9.4 0 top
R11  2.2k  [0603]  94.74,23.37 90 top
R12  2.2k  [0603]  99.82,23.37 90 top
R13  1k  [0603]  113.03,9.4 0 top
R14  2.2k  [0603]  120.65,23.37 90 top
R15  2.2k  [0603]  125.73,23.37 90 top
R16  1k  [0603]  138.94,9.4 0 top
R17  2.2k  [0603]  146.56,23.37 90 top
R18  2.2k  [0603]  151.64,23.37 90 top
R19  1k  [0603]  9.4,35.31 0 top
R20  2.2k  [0603]  17.02,49.28 90 top
R21  2.2k  [0603]  22.1,49.28 90 top
R22  1k  [0603]  35.31,35.31 0 top
R23  2.2k  [0603]  42.93,49.28 90 top
R24  2.2k  [0603]  48.01,49.28 90 top
R25  1k  [0603]  61.21,35.31 0 top
R26  2.2k  [0603]  68.83,49.28 90 top
R27  2.2k  [0603]  73.91,49.28 90 top
R28  1k  [0603]  87.12,35.31 0 top
R29  2.2k  [0603]  94.74,49.28 90 top
R30  2.2k  [0603]  99.82,49.28 90 top
R31  1k  [0603]  113.03,35.31 0 top
R32  2.2k  [0603]  120.65,49.28 90 top
R33  2.2k  [0603]  125.73,49.28 90 top
R34  1k  [0603]  138.94,35.31 0 top
R35  2.2k  [0603]  146.56,49.28 90 top
R36  2.2k  [0603]  151.64,49.28 90 top
R37  1k  [0603]  9.4,61.21 0 top
R38  2.2k  [0603]  17.02,75.18 90 top
R39  2.2k  [0603]  22.1,75.18 90 top
R40  1k  [0603]  35.31,61.21 0 top
R41  2.2k  [0603]  42.93,75.18 90 top
R42  2.2k  [0603]  48.01,75.18 90 top
R43  1k  [0603]  61.21,61.21 0 top
R44  2.2k  [0603]  68.83,75.18 90 top
R45  2.2k  [0603]  73.91,75.18 90 top
R46  1k  [0603]  87.12,61.21 0 top
R47  2.2k  [0603]  94.74,75.18 90 top
R48  2.2k  [0603]  99.82,75.18 90 top
R49  1k  [0603]  113.03,61.21 0 top
R50  2.2k  [0603]  120.65,75.18 90 top
R51  2.2k  [0603]  125.73,75.18 90 top
R52  1k  [0603]  138.94,61.21 0 top
R53  2.2k  [0603]  146.56,75.18 90 top
R54  2.2k  [0603]  151.64,75.18 90 top
R55  1k  [0603]  9.4,87.12 0 top
R56  2.2k  [0603]  17.02,101.09 90 top
R57  2.2k  [0603]  22.1,101.09 90 top
R58  1k  [0603]  35.31,87.12 0 top
R59  2.2k  [0603]  42.93,101.09 90 top
R60  2.2k  [0603]  48.01,101.09 90 top
R61  1k  [0603]  61.21,87.12 0 top
R62  2.2k  [0603]  68.83,101.09 90 top
R63  2.2k  [0603]  73.91,101.09 90 top
R64  1k  [0603]  87.12,87.12 0 top
R65  2.2k  [0603]  94.74,101.09 90 top
R66  2.2k  [0603]  99.82,101.09 90 top
R67  1k  [0603]  113.03,87.12 0 top
R68  2.2k  [0603]  120.65,101.09 90 top
R69  2.2k  [0603]  125.73,101.09 90 top
R70  1k  [0603]  138.94,87.12 0 top
R71  2.2k  [0603]  146.56,101.09 90 top
R72  2.2k  [0603]  151.64,101.09 90 top
U1  VEML6075  [VEML6075_A3OP]  19.56,19.56 0 top
U2  VEML6075  [VEML6075_A3OP]  45.47,19.56 0 top
U3  VEML6075  [VEML6075_A3OP]  71.37,19.56 0 top
U4  VEML6075  [VEML6075_A3OP]  97.28,19.56 0 top
U5  VEML6075  [VEML6075_A3OP]  123.19,19.56 0 top
U6  VEML6075  [VEML6075_A3OP]  149.1,19.56 0 top
U7  VEML6075  [VEML6075_A3OP]  19.56,45.47 0 top
U8  VEML6075  [VEML6075_A3OP]  45.47,45.47 0 top
U9  VEML6075  [VEML6075_A3OP]  71.37,45.47 0 top
U10  VEML6075  [VEML6075_A3OP]  97.28,45.47 0 top
U11  VEML6075  [VEML6075_A3OP]  123.19,45.47 0 top
U12  VEML6075  [VEML6075_A3OP]  149.1,45.47 0 top
U13  VEML6075  [VEML6075_A3OP]  19.56,71.37 0 top
U14  VEML6075  [VEML6075_A3OP]  45.47,71.37 0 top
U15  VEML6075  [VEML6075_A3OP]  71.37,71.37 0 top
U16  VEML6075  [VEML6075_A3OP]  97.28,71.37 0 top
U17  VEML6075  [VEML6075_A3OP]  123.19,71.37 0 top
U18  VEML6075  [VEML6075_A3OP]  149.1,71.37 0 top
U19  VEML6075  [VEML6075_A3OP]  19.56,97.28 0 top
U20  VEML6075  [VEML6075_A3OP]  45.47,97.28 0 top
U21  VEML6075  [VEML6075_A3OP]  71.37,97.28 0 top
U22  VEML6075  [VEML6075_A3OP]  97.28,97.28 0 top
U23  VEML6075  [VEML6075_A3OP]  123.19,97.28 0 top
U24  VEML6075  [VEML6075_A3OP]  149.1,97.28 0 top
U$1  SFE_LOGO_NAME_FLAME.1_INCH  [SFE_LOGO_NAME_FLAME_.1]  19.56,28.19 0 top
U$2  SFE_LOGO_NAME_FLAME.1_INCH  [SFE_LOGO_NAME_FLAME_.1]  19.56,28.19 0 bottom
U$3  [QWIIC-LOGO-MEDIUM]  29.21,10.79 0 bottom
U$4  [GND1]  15.75,8.51 90 bottom
U$5  [QWIIC_UV_SENSOR1]  11.18,25.78 0 top
U$6  [_VEML60750]  13.21,15.24 0 top
U$7  [3#3V2]  18.29,8.51 90 bottom
U$8  [SDA8]  20.83,8.51 90 bottom
U$9  [SCL9]  23.37,8.51 90 bottom
U$10  [I_SUPER2_C-()-03]  21.08,21.46 0 bottom
U$11  [QWIIC_UV_SENSOR1]  27.76,25.78 0 bottom
U$12  SFE_LOGO_NAME_FLAME.1_INCH  [SFE_LOGO_NAME_FLAME_.1]  45.47,28.19 0 bottom
U$13  SFE_LOGO_NAME_FLAME.1_INCH  [SFE_LOGO_NAME_FLAME_.1]  45.47,28.19 0 top
U$14  [QWIIC-LOGO-MEDIUM]  55.12,10.79 0 bottom
U$15  [3#3V2]  44.2,8.51 90 top
U$16  [PWR-()-03]  7.62,12.06 0 top
U$17  [GND1]  41.66,8.51 90 top
U$18  [SCL9]  49.28,8.51 90 top
U$19  [SDA8]  46.74,8.51 90 top
U$20  [I_SUPER2_C-()-03]  46.99,21.46 0 bottom
U$21  [3#3V2]  18.29,8.51 90 top
U$22  [GND1]  15.75,8.51 90 top
U$23  [PWR-()-03]  33.53,12.06 0 top
U$24  [_VEML60750]  39.12,15.24 0 top
U$25  [QWIIC_UV_SENSOR1]  37.08,25.78 0 top
U$26  [SCL9]  23.37,8.51 90 top
U$27  [SDA8]  20.83,8.51 90 top
U$28  [GND1]  41.66,8.51 90 bottom
U$29  [3#3V2]  44.2,8.51 90 bottom
U$30  [SDA8]  46.74,8.51 90 bottom
U$31  [SCL9]  49.28,8.51 90 bottom
U$32  [QWIIC_UV_SENSOR1]  53.67,25.78 0 bottom
U$33  SFE_LOGO_NAME_FLAME.1_INCH  [SFE_LOGO_NAME_FLAME_.1]  71.37,28.19 0 bottom
U$34  SFE_LOGO_NAME_FLAME.1_INCH  [SFE_LOGO_NAME_FLAME_.1]  71.37,28.19 0 top
U$35  [QWIIC-LOGO-MEDIUM]  81.03,10.79 0 bottom
U$36  [3#3V2]  70.1,8.51 90 top
U$37  [GND1]  67.56,8.51 90 top
U$38  [SCL9]  75.18,8.51 90 top
U$39  [SDA8]  72.64,8.51 90 top
U$40  [I_SUPER2_C-()-03]  72.9,21.46 0 bottom
U$41  [PWR-()-03]  59.44,12.06 0 top
U$42  [_VEML60750]  65.02,15.24 0 top
U$43  [QWIIC_UV_SENSOR1]  62.99,25.78 0 top
U$44  [GND1]  67.56,8.51 90 bottom
U$45  [3#3V2]  70.1,8.51 90 bottom
U$46  [SDA8]  72.64,8.51 90 bottom
U$47  [SCL9]  75.18,8.51 90 bottom
U$48  [QWIIC_UV_SENSOR1]  79.58,25.78 0 bottom
U$49  SFE_LOGO_NAME_FLAME.1_INCH  [SFE_LOGO_NAME_FLAME_.1]  97.28,28.19 0 bottom
U$50  SFE_LOGO_NAME_FLAME.1_INCH  [SFE_LOGO_NAME_FLAME_.1]  97.28,28.19 0 top
U$51  [QWIIC-LOGO-MEDIUM]  106.93,10.79 0 bottom
U$52  [3#3V2]  96.01,8.51 90 top
U$53  [GND1]  93.47,8.51 90 top
U$54  [SCL9]  101.09,8.51 90 top
U$55  [SDA8]  98.55,8.51 90 top
U$56  [I_SUPER2_C-()-03]  98.81,21.46 0 bottom
U$57  [PWR-()-03]  85.34,12.06 0 top
U$58  [_VEML60750]  90.93,15.24 0 top
U$59  [QWIIC_UV_SENSOR1]  88.9,25.78 0 top
U$60  [GND1]  93.47,8.51 90 bottom
U$61  [3#3V2]  96.01,8.51 90 bottom
U$62  [SDA8]  98.55,8.51 90 bottom
U$63  [SCL9]  101.09,8.51 90 bottom
U$64  [QWIIC_UV_SENSOR1]  105.49,25.78 0 bottom
U$65  SFE_LOGO_NAME_FLAME.1_INCH  [SFE_LOGO_NAME_FLAME_.1]  123.19,28.19 0 bottom
U$66  SFE_LOGO_NAME_FLAME.1_INCH  [SFE_LOGO_NAME_FLAME_.1]  123.19,28.19 0 top
U$67  [QWIIC-LOGO-MEDIUM]  132.84,10.79 0 bottom
U$68  [3#3V2]  121.92,8.51 90 top
U$69  [GND1]  119.38,8.51 90 top
U$70  [SCL9]  127,8.51 90 top
U$71  [SDA8]  124.46,8.51 90 top
U$72  [I_SUPER2_C-()-03]  124.71,21.46 0 bottom
U$73  [PWR-()-03]  111.25,12.06 0 top
U$74  [_VEML60750]  116.84,15.24 0 top
U$75  [QWIIC_UV_SENSOR1]  114.81,25.78 0 top
U$76  [GND1]  119.38,8.51 90 bottom
U$77  [3#3V2]  121.92,8.51 90 bottom
U$78  [SDA8]  124.46,8.51 90 bottom
U$79  [SCL9]  127,8.51 90 bottom
U$80  [QWIIC_UV_SENSOR1]  131.39,25.78 0 bottom
U$81  SFE_LOGO_NAME_FLAME.1_INCH  [SFE_LOGO_NAME_FLAME_.1]  149.1,28.19 0 bottom
U$82  SFE_LOGO_NAME_FLAME.1_INCH  [SFE_LOGO_NAME_FLAME_.1]  149.1,28.19 0 top
U$83  [QWIIC-LOGO-MEDIUM]  158.75,10.79 0 bottom
U$84  [3#3V2]  147.83,8.51 90 top
U$85  [GND1]  145.29,8.51 90 top
U$86  [SCL9]  152.91,8.51 90 top
U$87  [SDA8]  150.37,8.51 90 top
U$88  [I_SUPER2_C-()-03]  150.62,21.46 0 bottom
U$89  [PWR-()-03]  137.16,12.06 0 top
U$90  [_VEML60750]  142.75,15.24 0 top
U$91  [QWIIC_UV_SENSOR1]  140.72,25.78 0 top
U$92  [GND1]  145.29,8.51 90 bottom
U$93  [3#3V2]  147.83,8.51 90 bottom
U$94  [SDA8]  150.37,8.51 90 bottom
U$95  [SCL9]  152.91,8.51 90 bottom
U$96  [QWIIC_UV_SENSOR1]  157.3,25.78 0 bottom
U$97  SFE_LOGO_NAME_FLAME.1_INCH  [SFE_LOGO_NAME_FLAME_.1]  19.56,54.1 0 bottom
U$98  SFE_LOGO_NAME_FLAME.1_INCH  [SFE_LOGO_NAME_FLAME_.1]  19.56,54.1 0 top
U$99  [QWIIC-LOGO-MEDIUM]  29.21,36.7 0 bottom
U$100  [3#3V2]  18.29,34.42 90 top
U$101  [GND1]  15.75,34.42 90 top
U$102  [SCL9]  23.37,34.42 90 top
U$103  [SDA8]  20.83,34.42 90 top
U$104  [I_SUPER2_C-()-03]  21.08,47.37 0 bottom
U$105  [PWR-()-03]  7.62,37.97 0 top
U$106  [_VEML60750]  13.21,41.15 0 top
U$107  [QWIIC_UV_SENSOR1]  11.18,51.69 0 top
U$108  [GND1]  15.75,34.42 90 bottom
U$109  [3#3V2]  18.29,34.42 90 bottom
U$110  [SDA8]  20.83,34.42 90 bottom
U$111  [SCL9]  23.37,34.42 90 bottom
U$112  [QWIIC_UV_SENSOR1]  27.76,51.69 0 bottom
U$113  SFE_LOGO_NAME_FLAME.1_INCH  [SFE_LOGO_NAME_FLAME_.1]  45.47,54.1 0 bottom
U$114  SFE_LOGO_NAME_FLAME.1_INCH  [SFE_LOGO_NAME_FLAME_.1]  45.47,54.1 0 top
U$115  [QWIIC-LOGO-MEDIUM]  55.12,36.7 0 bottom
U$116  [3#3V2]  44.2,34.42 90 top
U$117  [GND1]  41.66,34.42 90 top
U$118  [SCL9]  49.28,34.42 90 top
U$119  [SDA8]  46.74,34.42 90 top
U$120  [I_SUPER2_C-()-03]  46.99,47.37 0 bottom
U$121  [PWR-()-03]  33.53,37.97 0 top
U$122  [_VEML60750]  39.12,41.15 0 top
U$123  [QWIIC_UV_SENSOR1]  37.08,51.69 0 top
U$124  [GND1]  41.66,34.42 90 bottom
U$125  [3#3V2]  44.2,34.42 90 bottom
U$126  [SDA8]  46.74,34.42 90 bottom
U$127  [SCL9]  49.28,34.42 90 bottom
U$128  [QWIIC_UV_SENSOR1]  53.67,51.69 0 bottom
U$129  SFE_LOGO_NAME_FLAME.1_INCH  [SFE_LOGO_NAME_FLAME_.1]  71.37,54.1 0 bottom
U$130  SFE_LOGO_NAME_FLAME.1_INCH  [SFE_LOGO_NAME_FLAME_.1]  71.37,54.1 0 top
U$131  [QWIIC-LOGO-MEDIUM]  81.03,36.7 0 bottom
U$132  [3#3V2]  70.1,34.42 90 top
U$133  [GND1]  67.56,34.42 90 top
U$134  [SCL9]  75.18,34.42 90 top
U$135  [SDA8]  72.64,34.42 90 top
U$136  [I_SUPER2_C-()-03]  72.9,47.37 0 bottom
U$137  [PWR-()-03]  59.44,37.97 0 top
U$138  [_VEML60750]  65.02,41.15 0 top
U$139  [QWIIC_UV_SENSOR1]  62.99,51.69 0 top
U$140  [GND1]  67.56,34.42 90 bottom
U$141  [3#3V2]  70.1,34.42 90 bottom
U$142  [SDA8]  72.64,34.42 90 bottom
U$143  [SCL9]  75.18,34.42 90 bottom
U$144  [QWIIC_UV_SENSOR1]  79.58,51.69 0 bottom
U$145  SFE_LOGO_NAME_FLAME.1_INCH  [SFE_LOGO_NAME_FLAME_.1]  97.28,54.1 0 bottom
U$146  SFE_LOGO_NAME_FLAME.1_INCH  [SFE_LOGO_NAME_FLAME_.1]  97.28,54.1 0 top
U$147  [QWIIC-LOGO-MEDIUM]  106.93,36.7 0 bottom
U$148  [3#3V2]  96.01,34.42 90 top
U$149  [GND1]  93.47,34.42 90 top
U$150  [SCL9]  101.09,34.42 90 top
U$151  [SDA8]  98.55,34.42 90 top
U$152  [I_SUPER2_C-()-03]  98.81,47.37 0 bottom
U$153  [PWR-()-03]  85.34,37.97 0 top
U$154  [_VEML60750]  90.93,41.15 0 top
U$155  [QWIIC_UV_SENSOR1]  88.9,51.69 0 top
U$156  [GND1]  93.47,34.42 90 bottom
U$157  [3#3V2]  96.01,34.42 90 bottom
U$158  [SDA8]  98.55,34.42 90 bottom
U$159  [SCL9]  101.09,34.42 90 bottom
U$160  [QWIIC_UV_SENSOR1]  105.49,51.69 0 bottom
U$161  SFE_LOGO_NAME_FLAME.1_INCH  [SFE_LOGO_NAME_FLAME_.1]  123.19,54.1 0 bottom
U$162  SFE_LOGO_NAME_FLAME.1_INCH  [SFE_LOGO_NAME_FLAME_.1]  123.19,54.1 0 top
U$163  [QWIIC-LOGO-MEDIUM]  132.84,36.7 0 bottom
U$164  [3#3V2]  121.92,34.42 90 top
U$165  [GND1]  119.38,34.42 90 top
U$166  [SCL9]  127,34.42 90 top
U$167  [SDA8]  124.46,34.42 90 top
U$168  [I_SUPER2_C-()-03]  124.71,47.37 0 bottom
U$169  [PWR-()-03]  111.25,37.97 0 top
U$170  [_VEML60750]  116.84,41.15 0 top
U$171  [QWIIC_UV_SENSOR1]  114.81,51.69 0 top
U$172  [GND1]  119.38,34.42 90 bottom
U$173  [3#3V2]  121.92,34.42 90 bottom
U$174  [SDA8]  124.46,34.42 90 bottom
U$175  [SCL9]  127,34.42 90 bottom
U$176  [QWIIC_UV_SENSOR1]  131.39,51.69 0 bottom
U$177  SFE_LOGO_NAME_FLAME.1_INCH  [SFE_LOGO_NAME_FLAME_.1]  149.1,54.1 0 bottom
U$178  SFE_LOGO_NAME_FLAME.1_INCH  [SFE_LOGO_NAME_FLAME_.1]  149.1,54.1 0 top
U$179  [QWIIC-LOGO-MEDIUM]  158.75,36.7 0 bottom
U$180  [3#3V2]  147.83,34.42 90 top
U$181  [GND1]  145.29,34.42 90 top
U$182  [SCL9]  152.91,34.42 90 top
U$183  [SDA8]  150.37,34.42 90 top
U$184  [I_SUPER2_C-()-03]  150.62,47.37 0 bottom
U$185  [PWR-()-03]  137.16,37.97 0 top
U$186  [_VEML60750]  142.75,41.15 0 top
U$187  [QWIIC_UV_SENSOR1]  140.72,51.69 0 top
U$188  [GND1]  145.29,34.42 90 bottom
U$189  [3#3V2]  147.83,34.42 90 bottom
U$190  [SDA8]  150.37,34.42 90 bottom
U$191  [SCL9]  152.91,34.42 90 bottom
U$192  [QWIIC_UV_SENSOR1]  157.3,51.69 0 bottom
U$193  SFE_LOGO_NAME_FLAME.1_INCH  [SFE_LOGO_NAME_FLAME_.1]  19.56,80.01 0 bottom
U$194  SFE_LOGO_NAME_FLAME.1_INCH  [SFE_LOGO_NAME_FLAME_.1]  19.56,80.01 0 top
U$195  [QWIIC-LOGO-MEDIUM]  29.21,62.61 0 bottom
U$196  [3#3V2]  18.29,60.32 90 top
U$197  [GND1]  15.75,60.32 90 top
U$198  [SCL9]  23.37,60.32 90 top
U$199  [SDA8]  20.83,60.32 90 top
U$200  [I_SUPER2_C-()-03]  21.08,73.28 0 bottom
U$201  [PWR-()-03]  7.62,63.88 0 top
U$202  [_VEML60750]  13.21,67.06 0 top
U$203  [QWIIC_UV_SENSOR1]  11.18,77.6 0 top
U$204  [GND1]  15.75,60.32 90 bottom
U$205  [3#3V2]  18.29,60.32 90 bottom
U$206  [SDA8]  20.83,60.32 90 bottom
U$207  [SCL9]  23.37,60.32 90 bottom
U$208  [QWIIC_UV_SENSOR1]  27.76,77.6 0 bottom
U$209  SFE_LOGO_NAME_FLAME.1_INCH  [SFE_LOGO_NAME_FLAME_.1]  45.47,80.01 0 bottom
U$210  SFE_LOGO_NAME_FLAME.1_INCH  [SFE_LOGO_NAME_FLAME_.1]  45.47,80.01 0 top
U$211  [QWIIC-LOGO-MEDIUM]  55.12,62.61 0 bottom
U$212  [3#3V2]  44.2,60.32 90 top
U$213  [GND1]  41.66,60.32 90 top
U$214  [SCL9]  49.28,60.32 90 top
U$215  [SDA8]  46.74,60.32 90 top
U$216  [I_SUPER2_C-()-03]  46.99,73.28 0 bottom
U$217  [PWR-()-03]  33.53,63.88 0 top
U$218  [_VEML60750]  39.12,67.06 0 top
U$219  [QWIIC_UV_SENSOR1]  37.08,77.6 0 top
U$220  [GND1]  41.66,60.32 90 bottom
U$221  [3#3V2]  44.2,60.32 90 bottom
U$222  [SDA8]  46.74,60.32 90 bottom
U$223  [SCL9]  49.28,60.32 90 bottom
U$224  [QWIIC_UV_SENSOR1]  53.67,77.6 0 bottom
U$225  SFE_LOGO_NAME_FLAME.1_INCH  [SFE_LOGO_NAME_FLAME_.1]  71.37,80.01 0 bottom
U$226  SFE_LOGO_NAME_FLAME.1_INCH  [SFE_LOGO_NAME_FLAME_.1]  71.37,80.01 0 top
U$227  [QWIIC-LOGO-MEDIUM]  81.03,62.61 0 bottom
U$228  [3#3V2]  70.1,60.32 90 top
U$229  [GND1]  67.56,60.32 90 top
U$230  [SCL9]  75.18,60.32 90 top
U$231  [SDA8]  72.64,60.32 90 top
U$232  [I_SUPER2_C-()-03]  72.9,73.28 0 bottom
U$233  [PWR-()-03]  59.44,63.88 0 top
U$234  [_VEML60750]  65.02,67.06 0 top
U$235  [QWIIC_UV_SENSOR1]  62.99,77.6 0 top
U$236  [GND1]  67.56,60.32 90 bottom
U$237  [3#3V2]  70.1,60.32 90 bottom
U$238  [SDA8]  72.64,60.32 90 bottom
U$239  [SCL9]  75.18,60.32 90 bottom
U$240  [QWIIC_UV_SENSOR1]  79.58,77.6 0 bottom
U$241  SFE_LOGO_NAME_FLAME.1_INCH  [SFE_LOGO_NAME_FLAME_.1]  97.28,80.01 0 bottom
U$242  SFE_LOGO_NAME_FLAME.1_INCH  [SFE_LOGO_NAME_FLAME_.1]  97.28,80.01 0 top
U$243  [QWIIC-LOGO-MEDIUM]  106.93,62.61 0 bottom
U$244  [3#3V2]  96.01,60.32 90 top
U$245  [GND1]  93.47,60.32 90 top
U$246  [SCL9]  101.09,60.32 90 top
U$247  [SDA8]  98.55,60.32 90 top
U$248  [I_SUPER2_C-()-03]  98.81,73.28 0 bottom
U$249  [PWR-()-03]  85.34,63.88 0 top
U$250  [_VEML60750]  90.93,67.06 0 top
U$251  [QWIIC_UV_SENSOR1]  88.9,77.6 0 top
U$252  [GND1]  93.47,60.32 90 bottom
U$253  [3#3V2]  96.01,60.32 90 bottom
U$254  [SDA8]  98.55,60.32 90 bottom
U$255  [SCL9]  101.09,60.32 90 bottom
U$256  [QWIIC_UV_SENSOR1]  105.49,77.6 0 bottom
U$257  SFE_LOGO_NAME_FLAME.1_INCH  [SFE_LOGO_NAME_FLAME_.1]  123.19,80.01 0 bottom
U$258  SFE_LOGO_NAME_FLAME.1_INCH  [SFE_LOGO_NAME_FLAME_.1]  123.19,80.01 0 top
U$259  [QWIIC-LOGO-MEDIUM]  132.84,62.61 0 bottom
U$260  [3#3V2]  121.92,60.32 90 top
U$261  [GND1]  119.38,60.32 90 top
U$262  [SCL9]  127,60.32 90 top
U$263  [SDA8]  124.46,60.32 90 top
U$264  [I_SUPER2_C-()-03]  124.71,73.28 0 bottom
U$265  [PWR-()-03]  111.25,63.88 0 top
U$266  [_VEML60750]  116.84,67.06 0 top
U$267  [QWIIC_UV_SENSOR1]  114.81,77.6 0 top
U$268  [GND1]  119.38,60.32 90 bottom
U$269  [3#3V2]  121.92,60.32 90 bottom
U$270  [SDA8]  124.46,60.32 90 bottom
U$271  [SCL9]  127,60.32 90 bottom
U$272  [QWIIC_UV_SENSOR1]  131.39,77.6 0 bottom
U$273  SFE_LOGO_NAME_FLAME.1_INCH  [SFE_LOGO_NAME_FLAME_.1]  149.1,80.01 0 bottom
U$274  SFE_LOGO_NAME_FLAME.1_INCH  [SFE_LOGO_NAME_FLAME_.1]  149.1,80.01 0 top
U$275  [QWIIC-LOGO-MEDIUM]  158.75,62.61 0 bottom
U$276  [3#3V2]  147.83,60.32 90 top
U$277  [GND1]  145.29,60.32 90 top
U$278  [SCL9]  152.91,60.32 90 top
U$279  [SDA8]  150.37,60.32 90 top
U$280  [I_SUPER2_C-()-03]  150.62,73.28 0 bottom
U$281  [PWR-()-03]  137.16,63.88 0 top
U$282  [_VEML60750]  142.75,67.06 0 top
U$283  [QWIIC_UV_SENSOR1]  140.72,77.6 0 top
U$284  [GND1]  145.29,60.32 90 bottom
U$285  [3#3V2]  147.83,60.32 90 bottom
U$286  [SDA8]  150.37,60.32 90 bottom
U$287  [SCL9]  152.91,60.32 90 bottom
U$288  [QWIIC_UV_SENSOR1]  157.3,77.6 0 bottom
U$289  SFE_LOGO_NAME_FLAME.1_INCH  [SFE_LOGO_NAME_FLAME_.1]  19.56,105.92 0 bottom
U$290  SFE_LOGO_NAME_FLAME.1_INCH  [SFE_LOGO_NAME_FLAME_.1]  19.56,105.92 0 top
U$291  [QWIIC-LOGO-MEDIUM]  29.21,88.52 0 bottom
U$292  [3#3V2]  18.29,86.23 90 top
U$293  [GND1]  15.75,86.23 90 top
U$294  [SCL9]  23.37,86.23 90 top
U$295  [SDA8]  20.83,86.23 90 top
U$296  [I_SUPER2_C-()-03]  21.08,99.19 0 bottom
U$297  [PWR-()-03]  7.62,89.79 0 top
U$298  [_VEML60750]  13.21,92.96 0 top
U$299  [QWIIC_UV_SENSOR1]  11.18,103.51 0 top
U$300  [GND1]  15.75,86.23 90 bottom
U$301  [3#3V2]  18.29,86.23 90 bottom
U$302  [SDA8]  20.83,86.23 90 bottom
U$303  [SCL9]  23.37,86.23 90 bottom
U$304  [QWIIC_UV_SENSOR1]  27.76,103.51 0 bottom
U$305  SFE_LOGO_NAME_FLAME.1_INCH  [SFE_LOGO_NAME_FLAME_.1]  45.47,105.92 0 bottom
U$306  SFE_LOGO_NAME_FLAME.1_INCH  [SFE_LOGO_NAME_FLAME_.1]  45.47,105.92 0 top
U$307  [QWIIC-LOGO-MEDIUM]  55.12,88.52 0 bottom
U$308  [3#3V2]  44.2,86.23 90 top
U$309  [GND1]  41.66,86.23 90 top
U$310  [SCL9]  49.28,86.23 90 top
U$311  [SDA8]  46.74,86.23 90 top
U$312  [I_SUPER2_C-()-03]  46.99,99.19 0 bottom
U$313  [PWR-()-03]  33.53,89.79 0 top
U$314  [_VEML60750]  39.12,92.96 0 top
U$315  [QWIIC_UV_SENSOR1]  37.08,103.51 0 top
U$316  [GND1]  41.66,86.23 90 bottom
U$317  [3#3V2]  44.2,86.23 90 bottom
U$318  [SDA8]  46.74,86.23 90 bottom
U$319  [SCL9]  49.28,86.23 90 bottom
U$320  [QWIIC_UV_SENSOR1]  53.67,103.51 0 bottom
U$321  SFE_LOGO_NAME_FLAME.1_INCH  [SFE_LOGO_NAME_FLAME_.1]  71.37,105.92 0 bottom
U$322  SFE_LOGO_NAME_FLAME.1_INCH  [SFE_LOGO_NAME_FLAME_.1]  71.37,105.92 0 top
U$323  [QWIIC-LOGO-MEDIUM]  81.03,88.52 0 bottom
U$324  [3#3V2]  70.1,86.23 90 top
U$325  [GND1]  67.56,86.23 90 top
U$326  [SCL9]  75.18,86.23 90 top
U$327  [SDA8]  72.64,86.23 90 top
U$328  [I_SUPER2_C-()-03]  72.9,99.19 0 bottom
U$329  [PWR-()-03]  59.44,89.79 0 top
U$330  [_VEML60750]  65.02,92.96 0 top
U$331  [QWIIC_UV_SENSOR1]  62.99,103.51 0 top
U$332  [GND1]  67.56,86.23 90 bottom
U$333  [3#3V2]  70.1,86.23 90 bottom
U$334  [SDA8]  72.64,86.23 90 bottom
U$335  [SCL9]  75.18,86.23 90 bottom
U$336  [QWIIC_UV_SENSOR1]  79.58,103.51 0 bottom
U$337  SFE_LOGO_NAME_FLAME.1_INCH  [SFE_LOGO_NAME_FLAME_.1]  97.28,105.92 0 bottom
U$338  SFE_LOGO_NAME_FLAME.1_INCH  [SFE_LOGO_NAME_FLAME_.1]  97.28,105.92 0 top
U$339  [QWIIC-LOGO-MEDIUM]  106.93,88.52 0 bottom
U$340  [3#3V2]  96.01,86.23 90 top
U$341  [GND1]  93.47,86.23 90 top
U$342  [SCL9]  101.09,86.23 90 top
U$343  [SDA8]  98.55,86.23 90 top
U$344  [I_SUPER2_C-()-03]  98.81,99.19 0 bottom
U$345  [PWR-()-03]  85.34,89.79 0 top
U$346  [_VEML60750]  90.93,92.96 0 top
U$347  [QWIIC_UV_SENSOR1]  88.9,103.51 0 top
U$348  [GND1]  93.47,86.23 90 bottom
U$349  [3#3V2]  96.01,86.23 90 bottom
U$350  [SDA8]  98.55,86.23 90 bottom
U$351  [SCL9]  101.09,86.23 90 bottom
U$352  [QWIIC_UV_SENSOR1]  105.49,103.51 0 bottom
U$353  SFE_LOGO_NAME_FLAME.1_INCH  [SFE_LOGO_NAME_FLAME_.1]  123.19,105.92 0 bottom
U$354  SFE_LOGO_NAME_FLAME.1_INCH  [SFE_LOGO_NAME_FLAME_.1]  123.19,105.92 0 top
U$355  [QWIIC-LOGO-MEDIUM]  132.84,88.52 0 bottom
U$356  [3#3V2]  121.92,86.23 90 top
U$357  [GND1]  119.38,86.23 90 top
U$358  [SCL9]  127,86.23 90 top
U$359  [SDA8]  124.46,86.23 90 top
U$360  [I_SUPER2_C-()-03]  124.71,99.19 0 bottom
U$361  [PWR-()-03]  111.25,89.79 0 top
U$362  [_VEML60750]  116.84,92.96 0 top
U$363  [QWIIC_UV_SENSOR1]  114.81,103.51 0 top
U$364  [GND1]  119.38,86.23 90 bottom
U$365  [3#3V2]  121.92,86.23 90 bottom
U$366  [SDA8]  124.46,86.23 90 bottom
U$367  [SCL9]  127,86.23 90 bottom
U$368  [QWIIC_UV_SENSOR1]  131.39,103.51 0 bottom
U$369  SFE_LOGO_NAME_FLAME.1_INCH  [SFE_LOGO_NAME_FLAME_.1]  149.1,105.92 0 bottom
U$370  SFE_LOGO_NAME_FLAME.1_INCH  [SFE_LOGO_NAME_FLAME_.1]  149.1,105.92 0 top
U$371  [QWIIC-LOGO-MEDIUM]  158.75,88.52 0 bottom
U$372  [3#3V2]  147.83,86.23 90 top
U$373  [GND1]  145.29,86.23 90 top
U$374  [SCL9]  152.91,86.23 90 top
U$375  [SDA8]  150.37,86.23 90 top
U$376  [I_SUPER2_C-()-03]  150.62,99.19 0 bottom
U$377  [PWR-()-03]  137.16,89.79 0 top
U$378  [_VEML60750]  142.75,92.96 0 top
U$379  [QWIIC_UV_SENSOR1]  140.72,103.51 0 top
U$380  [GND1]  145.29,86.23 90 bottom
U$381  [3#3V2]  147.83,86.23 90 bottom
U$382  [SDA8]  150.37,86.23 90 bottom
U$383  [SCL9]  152.91,86.23 90 bottom
U$384  [QWIIC_UV_SENSOR1]  157.3,103.51 0 bottom

## Library data of the parts
C1-C24 = SparkFun-Capacitors; PROD_ID: CAP-00810
D1-D24 = SparkFun-LED; PROD_ID: DIO-00819
E$1 E$2 LOGO1-LOGO24 U$1 U$2 U$12 U$13 U$33 U$34 U$49 U$50 U$65 U$66 U$81 U$82 U$97 U$98 U$113 U$114 U$129 U$130 U$145 U$146 U$161 U$162 U$177 U$178 U$193 U$194 U$209 U$210 U$225 U$226 U$241 U$242 U$257 U$258 U$273 U$274 U$289 U$290 U$305 U$306 U$321 U$322 U$337 U$338 U$353 U$354 U$369 U$370 = SparkFun-Aesthetics
E$3 = SparkFun-Retired
J1 J2 J4 J6 J7 J9 J10 J12 J13 J15 J16 J18 J19 J21 J22 J24 J25 J27 J28 J30 J31 J33 J34 J36 J37 J39 J40 J42 J43 J45 J46 J48 J49 J51 J52 J54 J55 J57 J58 J60 J61 J63 J64 J66 J67 J69 J70 J72 = SparkFun-Connectors; PROD_ID: CONN-13694
J3 J5 J8 J11 J14 J17 J20 J23 J26 J29 J32 J35 J38 J41 J44 J47 J50 J53 J56 J59 J62 J65 J68 J71 = SparkX
JP1 JP8 JP15 JP22 JP29 JP36 JP43 JP50 JP57 JP64 JP71 JP78 JP85 JP92 JP99 JP106 JP113 JP120 JP127 JP134 JP141 JP148 JP155 JP162 = SparkFun-Jumpers
JP2-JP7 JP9-JP14 JP16-JP21 JP23-JP28 JP30-JP35 JP37-JP42 JP44-JP49 JP51-JP56 JP58-JP63 JP65-JP70 JP72-JP77 JP79-JP84 JP86-JP91 JP93-JP98 JP100-JP105 JP107-JP112 JP114-JP119 JP121-JP126 JP128-JP133 JP135-JP140 JP142-JP147 JP149-JP154 JP156-JP161 JP163-JP168 = SparkFun
R1 R2 R5 R6 R8 R9 R11 R12 R14 R15 R17 R18 R20 R21 R23 R24 R26 R27 R29 R30 R32 R33 R35 R36 R38 R39 R41 R42 R44 R45 R47 R48 R50 R51 R53 R54 R56 R57 R59 R60 R62 R63 R65 R66 R68 R69 R71 R72 = SparkFun-Resistors; PROD_ID: RES-08272
R3 R4 R7 R10 R13 R16 R19 R22 R25 R28 R31 R34 R37 R40 R43 R46 R49 R52 R55 R58 R61 R64 R67 R70 = SparkFun-Resistors; PROD_ID: RES-07856
U1-U24 = SparkFun-Sensors; PROD_ID: IC-14149
U$3 U$10 U$14 U$16 U$20 U$23 U$35 U$40 U$41 U$51 U$56 U$57 U$67 U$72 U$73 U$83 U$88 U$89 U$99 U$104 U$105 U$115 U$120 U$121 U$131 U$136 U$137 U$147 U$152 U$153 U$163 U$168 U$169 U$179 U$184 U$185 U$195 U$200 U$201 U$211 U$216 U$217 U$227 U$232 U$233 U$243 U$248 U$249 U$259 U$264 U$265 U$275 U$280 U$281 U$291 U$296 U$297 U$307 U$312 U$313 U$323 U$328 U$329 U$339 U$344 U$345 U$355 U$360 U$361 U$371 U$376 U$377 = Labels
U$4 U$7-U$9 U$15 U$17-U$19 U$21 U$22 U$26-U$31 U$36-U$39 U$44-U$47 U$52-U$55 U$60-U$63 U$68-U$71 U$76-U$79 U$84-U$87 U$92-U$95 U$100-U$103 U$108-U$111 U$116-U$119 U$124-U$127 U$132-U$135 U$140-U$143 U$148-U$151 U$156-U$159 U$164-U$167 U$172-U$175 U$180-U$183 U$188-U$191 U$196-U$199 U$204-U$207 U$212-U$215 U$220-U$223 U$228-U$231 U$236-U$239 U$244-U$247 U$252-U$255 U$260-U$263 U$268-U$271 U$276-U$279 U$284-U$287 U$292-U$295 U$300-U$303 U$308-U$311 U$316-U$319 U$324-U$327 U$332-U$335 U$340-U$343 U$348-U$351 U$356-U$359 U$364-U$367 U$372-U$375 U$380-U$383 = Labels-0_04
U$5 U$6 U$11 U$24 U$25 U$32 U$42 U$43 U$48 U$58 U$59 U$64 U$74 U$75 U$80 U$90 U$91 U$96 U$106 U$107 U$112 U$122 U$123 U$128 U$138 U$139 U$144 U$154 U$155 U$160 U$170 U$171 U$176 U$186 U$187 U$192 U$202 U$203 U$208 U$218 U$219 U$224 U$234 U$235 U$240 U$250 U$251 U$256 U$266 U$267 U$272 U$282 U$283 U$288 U$298 U$299 U$304 U$314 U$315 U$320 U$330 U$331 U$336 U$346 U$347 U$352 U$362 U$363 U$368 U$378 U$379 U$384 = Qwiic_UV_Sensor_VEML6075

## Nets
3.3V: C4.1 J2.2 J3.2 J4.2 JP1.2 R3.2 U1.4
3.3V1: C1.1 J1.2 J5.2 J6.2 JP8.2 R4.2 U2.4
3.3V2: C2.1 J7.2 J8.2 J9.2 JP15.2 R7.2 U3.4
3.3V3: C3.1 J10.2 J11.2 J12.2 JP22.2 R10.2 U4.4
3.3V4: C5.1 J13.2 J14.2 J15.2 JP29.2 R13.2 U5.4
3.3V5: C6.1 J16.2 J17.2 J18.2 JP36.2 R16.2 U6.4
3.3V6: C7.1 J19.2 J20.2 J21.2 JP43.2 R19.2 U7.4
3.3V7: C8.1 J22.2 J23.2 J24.2 JP50.2 R22.2 U8.4
3.3V8: C9.1 J25.2 J26.2 J27.2 JP57.2 R25.2 U9.4
3.3V9: C10.1 J28.2 J29.2 J30.2 JP64.2 R28.2 U10.4
3.3V10: C11.1 J31.2 J32.2 J33.2 JP71.2 R31.2 U11.4
3.3V11: C12.1 J34.2 J35.2 J36.2 JP78.2 R34.2 U12.4
3.3V12: C13.1 J37.2 J38.2 J39.2 JP85.2 R37.2 U13.4
3.3V13: C14.1 J40.2 J41.2 J42.2 JP92.2 R40.2 U14.4
3.3V14: C15.1 J43.2 J44.2 J45.2 JP99.2 R43.2 U15.4
3.3V15: C16.1 J46.2 J47.2 J48.2 JP106.2 R46.2 U16.4
3.3V16: C17.1 J49.2 J50.2 J51.2 JP113.2 R49.2 U17.4
3.3V17: C18.1 J52.2 J53.2 J54.2 JP120.2 R52.2 U18.4
3.3V18: C19.1 J55.2 J56.2 J57.2 JP127.2 R55.2 U19.4
3.3V19: C20.1 J58.2 J59.2 J60.2 JP134.2 R58.2 U20.4
3.3V20: C21.1 J61.2 J62.2 J63.2 JP141.2 R61.2 U21.4
3.3V21: C22.1 J64.2 J65.2 J66.2 JP148.2 R64.2 U22.4
3.3V22: C23.1 J67.2 J68.2 J69.2 JP155.2 R67.2 U23.4
3.3V23: C24.1 J70.2 J71.2 J72.2 JP162.2 R70.2 U24.4
GND: C4.2 D1.C J2.1 J3.1 J4.1 U1.1
GND1: C1.2 D2.C J1.1 J5.1 J6.1 U2.1
GND2: C2.2 D3.C J7.1 J8.1 J9.1 U3.1
GND3: C3.2 D4.C J10.1 J11.1 J12.1 U4.1
GND4: C5.2 D5.C J13.1 J14.1 J15.1 U5.1
GND5: C6.2 D6.C J16.1 J17.1 J18.1 U6.1
GND6: C7.2 D7.C J19.1 J20.1 J21.1 U7.1
GND7: C8.2 D8.C J22.1 J23.1 J24.1 U8.1
GND8: C9.2 D9.C J25.1 J26.1 J27.1 U9.1
GND9: C10.2 D10.C J28.1 J29.1 J30.1 U10.1
GND10: C11.2 D11.C J31.1 J32.1 J33.1 U11.1
GND11: C12.2 D12.C J34.1 J35.1 J36.1 U12.1
GND12: C13.2 D13.C J37.1 J38.1 J39.1 U13.1
GND13: C14.2 D14.C J40.1 J41.1 J42.1 U14.1
GND14: C15.2 D15.C J43.1 J44.1 J45.1 U15.1
GND15: C16.2 D16.C J46.1 J47.1 J48.1 U16.1
GND16: C17.2 D17.C J49.1 J50.1 J51.1 U17.1
GND17: C18.2 D18.C J52.1 J53.1 J54.1 U18.1
GND18: C19.2 D19.C J55.1 J56.1 J57.1 U19.1
GND19: C20.2 D20.C J58.1 J59.1 J60.1 U20.1
GND20: C21.2 D21.C J61.1 J62.1 J63.1 U21.1
GND21: C22.2 D22.C J64.1 J65.1 J66.1 U22.1
GND22: C23.2 D23.C J67.1 J68.1 J69.1 U23.1
GND23: C24.2 D24.C J70.1 J71.1 J72.1 U24.1
N$1: D2.A R4.1
N$2: JP8.3 R5.2
N$3: D1.A R3.1
N$4: JP1.3 R1.2
N$5: JP1.1 R2.2
N$6: JP8.1 R6.2
N$7: D3.A R7.1
N$8: JP15.3 R8.2
N$9: JP15.1 R9.2
N$10: D4.A R10.1
N$11: JP22.3 R11.2
N$12: JP22.1 R12.2
N$13: D5.A R13.1
N$14: JP29.3 R14.2
N$15: JP29.1 R15.2
N$16: D6.A R16.1
N$17: JP36.3 R17.2
N$18: JP36.1 R18.2
N$19: D7.A R19.1
N$20: JP43.3 R20.2
N$21: JP43.1 R21.2
N$22: D8.A R22.1
N$23: JP50.3 R23.2
N$24: JP50.1 R24.2
N$25: D9.A R25.1
N$26: JP57.3 R26.2
N$27: JP57.1 R27.2
N$28: D10.A R28.1
N$29: JP64.3 R29.2
N$30: JP64.1 R30.2
N$31: D11.A R31.1
N$32: JP71.3 R32.2
N$33: JP71.1 R33.2
N$34: D12.A R34.1
N$35: JP78.3 R35.2
N$36: JP78.1 R36.2
N$37: D13.A R37.1
N$38: JP85.3 R38.2
N$39: JP85.1 R39.2
N$40: D14.A R40.1
N$41: JP92.3 R41.2
N$42: JP92.1 R42.2
N$43: D15.A R43.1
N$44: JP99.3 R44.2
N$45: JP99.1 R45.2
N$46: D16.A R46.1
N$47: JP106.3 R47.2
N$48: JP106.1 R48.2
N$49: D17.A R49.1
N$50: JP113.3 R50.2
N$51: JP113.1 R51.2
N$52: D18.A R52.1
N$53: JP120.3 R53.2
N$54: JP120.1 R54.2
N$55: D19.A R55.1
N$56: JP127.3 R56.2
N$57: JP127.1 R57.2
N$58: D20.A R58.1
N$59: JP134.3 R59.2
N$60: JP134.1 R60.2
N$61: D21.A R61.1
N$62: JP141.3 R62.2
N$63: JP141.1 R63.2
N$64: D22.A R64.1
N$65: JP148.3 R65.2
N$66: JP148.1 R66.2
N$67: D23.A R67.1
N$68: JP155.3 R68.2
N$69: JP155.1 R69.2
N$70: D24.A R70.1
N$71: JP162.3 R71.2
N$72: JP162.1 R72.2
SCL: J2.4 J3.4 J4.4 R2.1 U1.3
SCL1: J1.4 J5.4 J6.4 R6.1 U2.3
SCL2: J7.4 J8.4 J9.4 R9.1 U3.3
SCL3: J10.4 J11.4 J12.4 R12.1 U4.3
SCL4: J13.4 J14.4 J15.4 R15.1 U5.3
SCL5: J16.4 J17.4 J18.4 R18.1 U6.3
SCL6: J19.4 J20.4 J21.4 R21.1 U7.3
SCL7: J22.4 J23.4 J24.4 R24.1 U8.3
SCL8: J25.4 J26.4 J27.4 R27.1 U9.3
SCL9: J28.4 J29.4 J30.4 R30.1 U10.3
SCL10: J31.4 J32.4 J33.4 R33.1 U11.3
SCL11: J34.4 J35.4 J36.4 R36.1 U12.3
SCL12: J37.4 J38.4 J39.4 R39.1 U13.3
SCL13: J40.4 J41.4 J42.4 R42.1 U14.3
SCL14: J43.4 J44.4 J45.4 R45.1 U15.3
SCL15: J46.4 J47.4 J48.4 R48.1 U16.3
SCL16: J49.4 J50.4 J51.4 R51.1 U17.3
SCL17: J52.4 J53.4 J54.4 R54.1 U18.3
SCL18: J55.4 J56.4 J57.4 R57.1 U19.3
SCL19: J58.4 J59.4 J60.4 R60.1 U20.3
SCL20: J61.4 J62.4 J63.4 R63.1 U21.3
SCL21: J64.4 J65.4 J66.4 R66.1 U22.3
SCL22: J67.4 J68.4 J69.4 R69.1 U23.3
SCL23: J70.4 J71.4 J72.4 R72.1 U24.3
SDA: J2.3 J3.3 J4.3 R1.1 U1.2
SDA1: J1.3 J5.3 J6.3 R5.1 U2.2
SDA2: J7.3 J8.3 J9.3 R8.1 U3.2
SDA3: J10.3 J11.3 J12.3 R11.1 U4.2
SDA4: J13.3 J14.3 J15.3 R14.1 U5.2
SDA5: J16.3 J17.3 J18.3 R17.1 U6.2
SDA6: J19.3 J20.3 J21.3 R20.1 U7.2
SDA7: J22.3 J23.3 J24.3 R23.1 U8.2
SDA8: J25.3 J26.3 J27.3 R26.1 U9.2
SDA9: J28.3 J29.3 J30.3 R29.1 U10.2
SDA10: J31.3 J32.3 J33.3 R32.1 U11.2
SDA11: J34.3 J35.3 J36.3 R35.1 U12.2
SDA12: J37.3 J38.3 J39.3 R38.1 U13.2
SDA13: J40.3 J41.3 J42.3 R41.1 U14.2
SDA14: J43.3 J44.3 J45.3 R44.1 U15.2
SDA15: J46.3 J47.3 J48.3 R47.1 U16.2
SDA16: J49.3 J50.3 J51.3 R50.1 U17.2
SDA17: J52.3 J53.3 J54.3 R53.1 U18.2
SDA18: J55.3 J56.3 J57.3 R56.1 U19.2
SDA19: J58.3 J59.3 J60.3 R59.1 U20.2
SDA20: J61.3 J62.3 J63.3 R62.1 U21.2
SDA21: J64.3 J65.3 J66.3 R65.1 U22.2
SDA22: J67.3 J68.3 J69.3 R68.1 U23.2
SDA23: J70.3 J71.3 J72.3 R71.1 U24.2